# Altium PCB tr-804-DECT_2023-07.PcbDoc (part 1 of 3)
Units mm, origin at the board's own origin, x right, y up, seen from the top; angles counter-clockwise.
Board outline 65 x 137.8 mm, 4 copper layers (Top Layer, Top, Internal Plane 1, PWR, Internal Plane 2, GND, Bottom Layer, Bottom); 160 components, 162 nets, 856 pads, 321 vias.
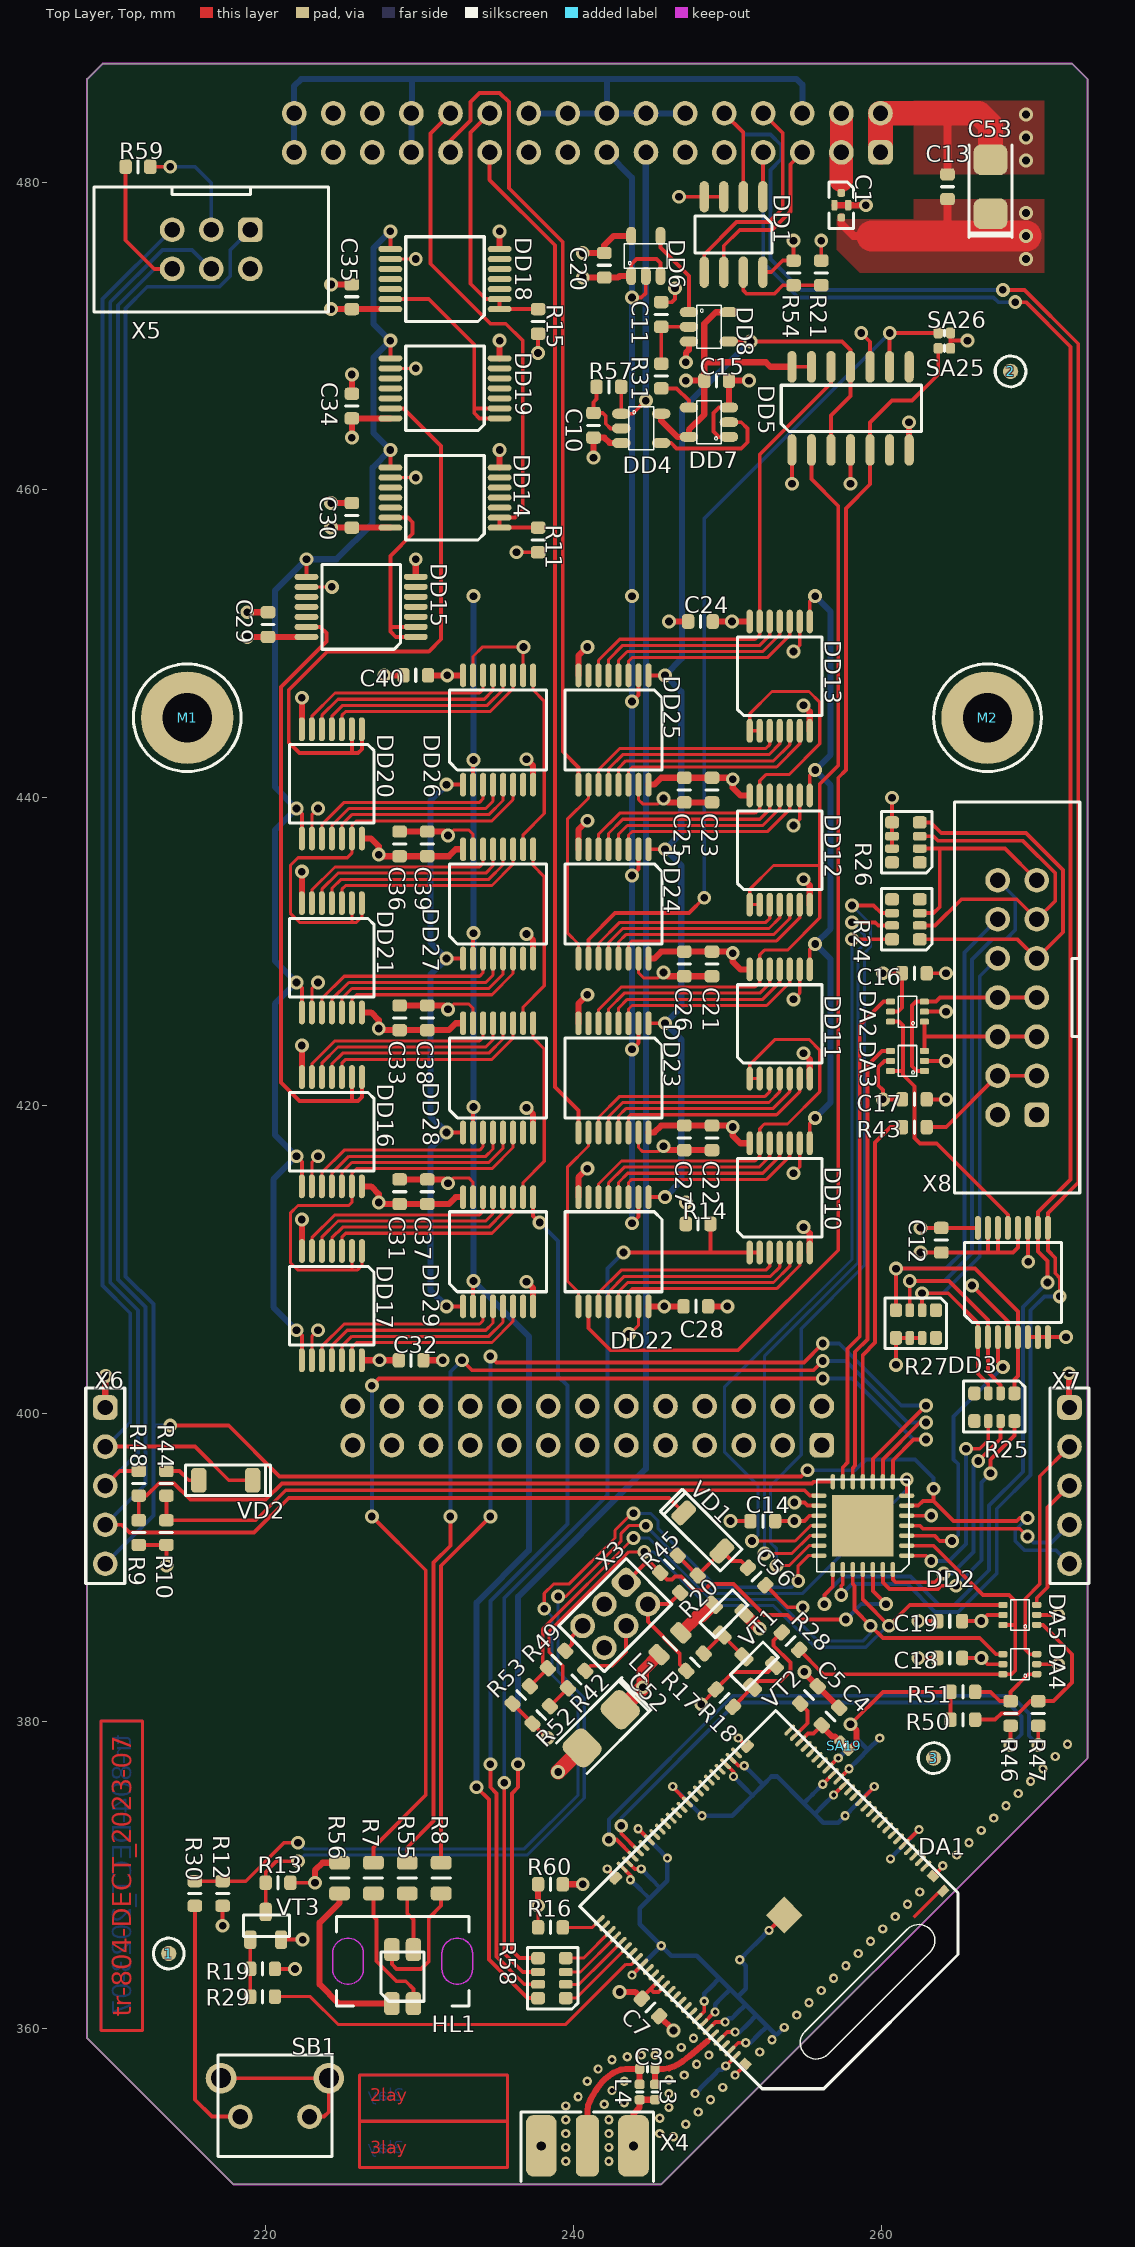
[diagram p0: Top Layer, Top view]
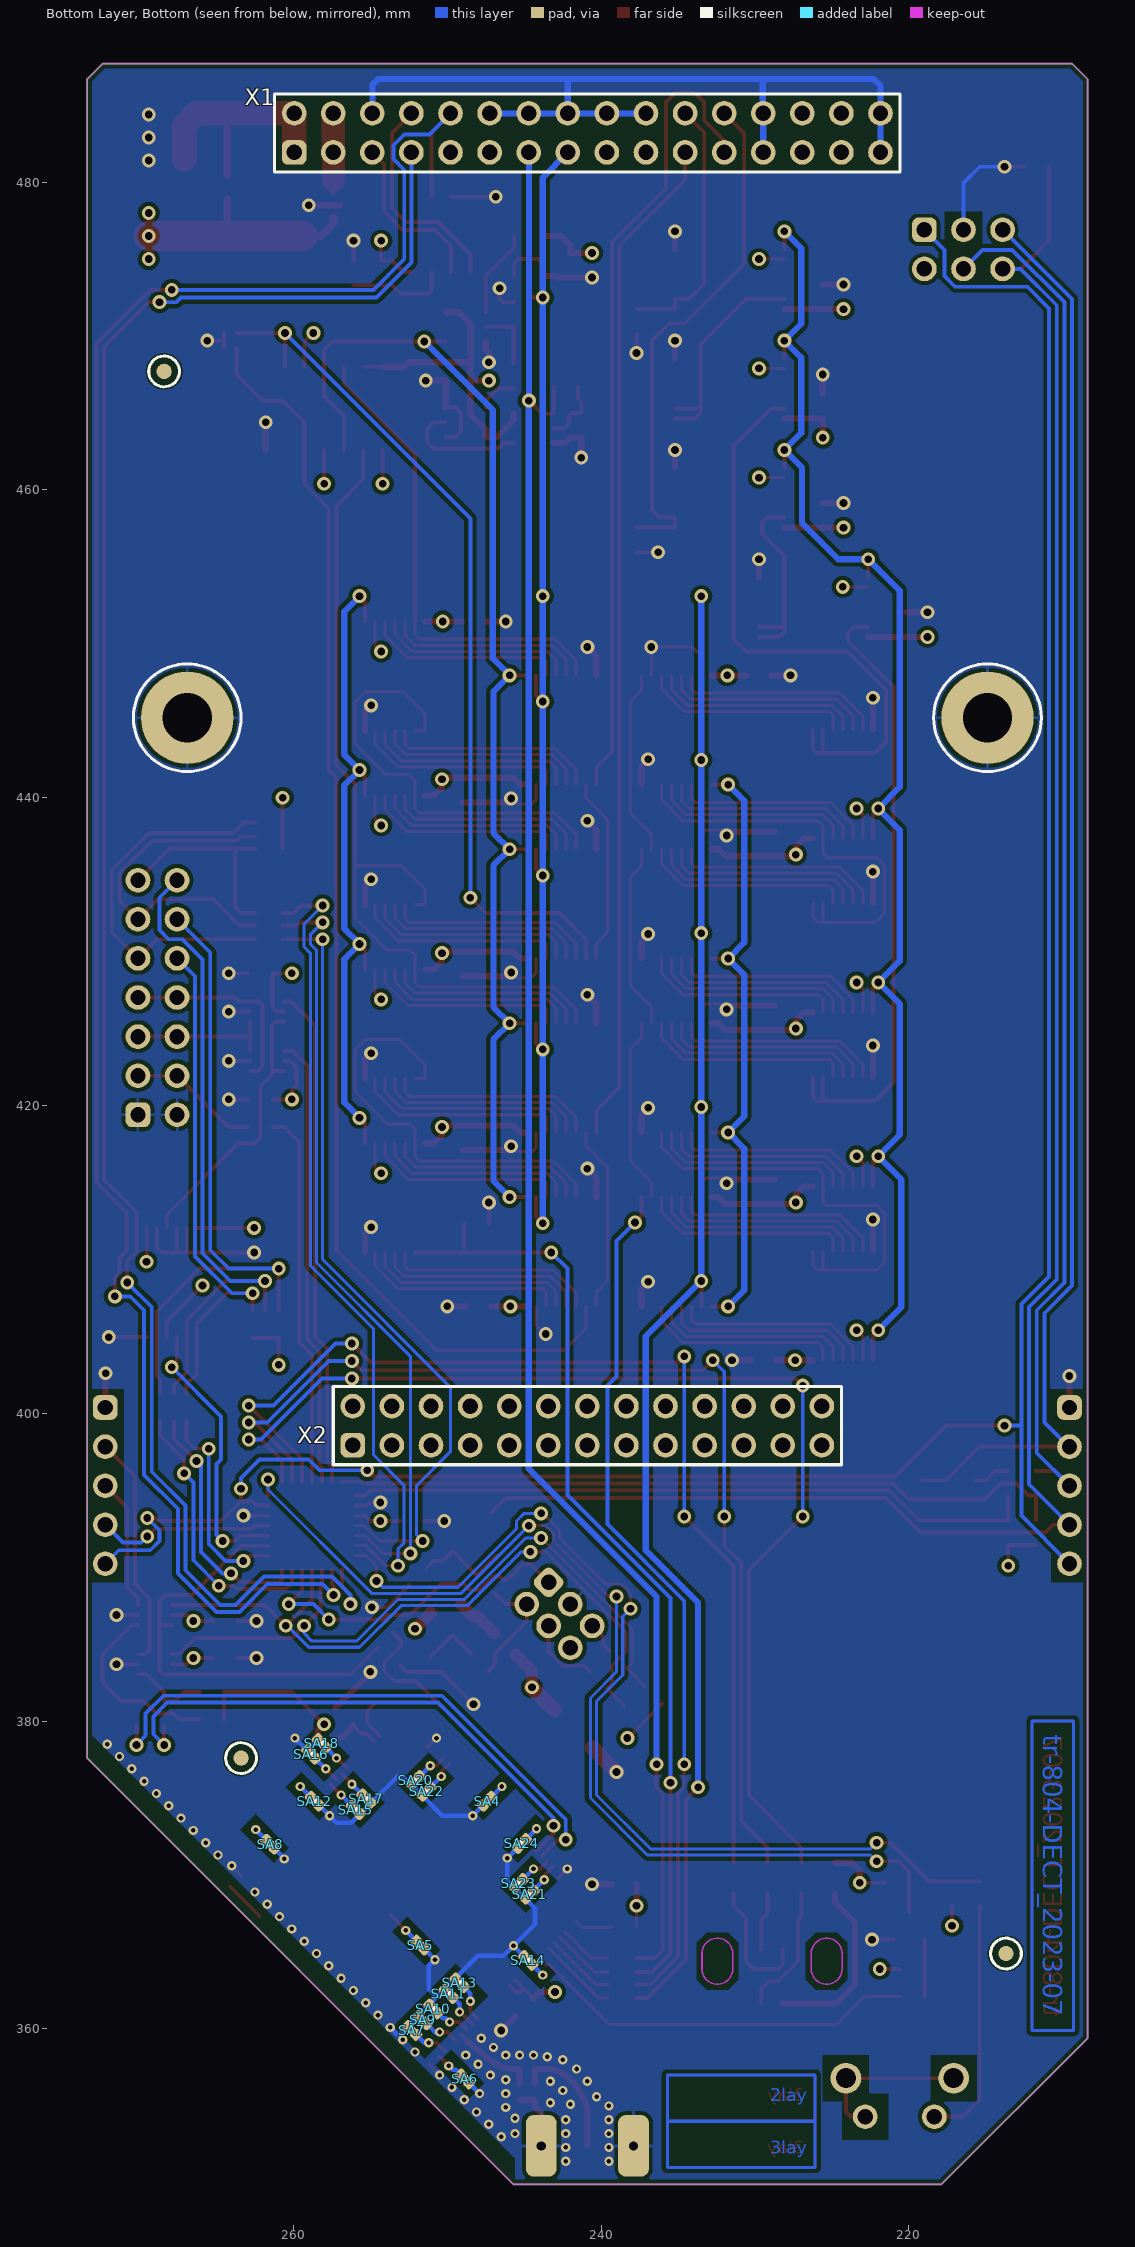
[diagram p1: Bottom Layer, Bottom view, seen from below]
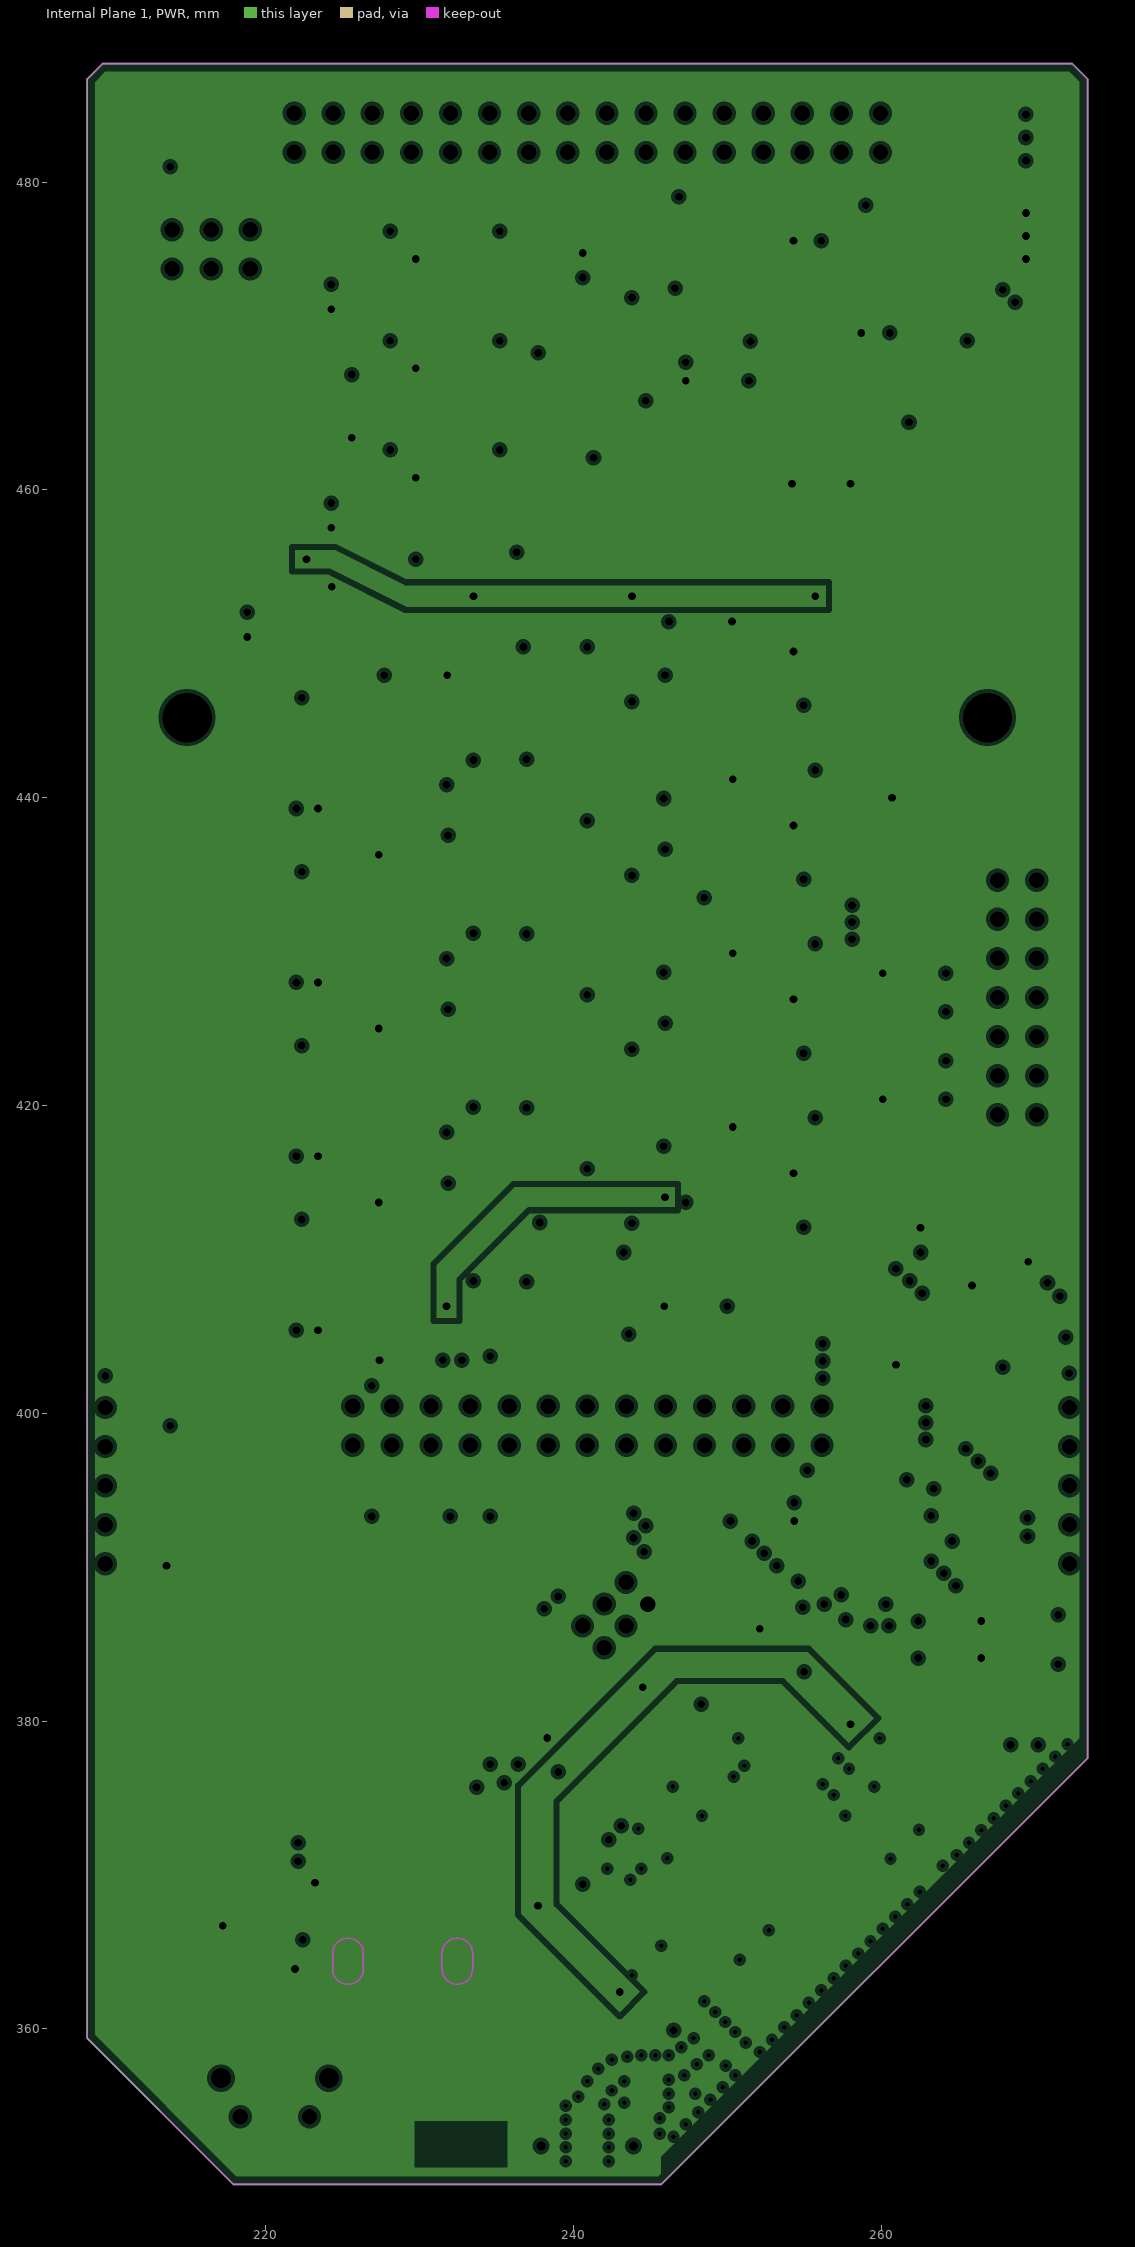
[diagram p2: Internal Plane 1, PWR, clearances drawn from the general rule]
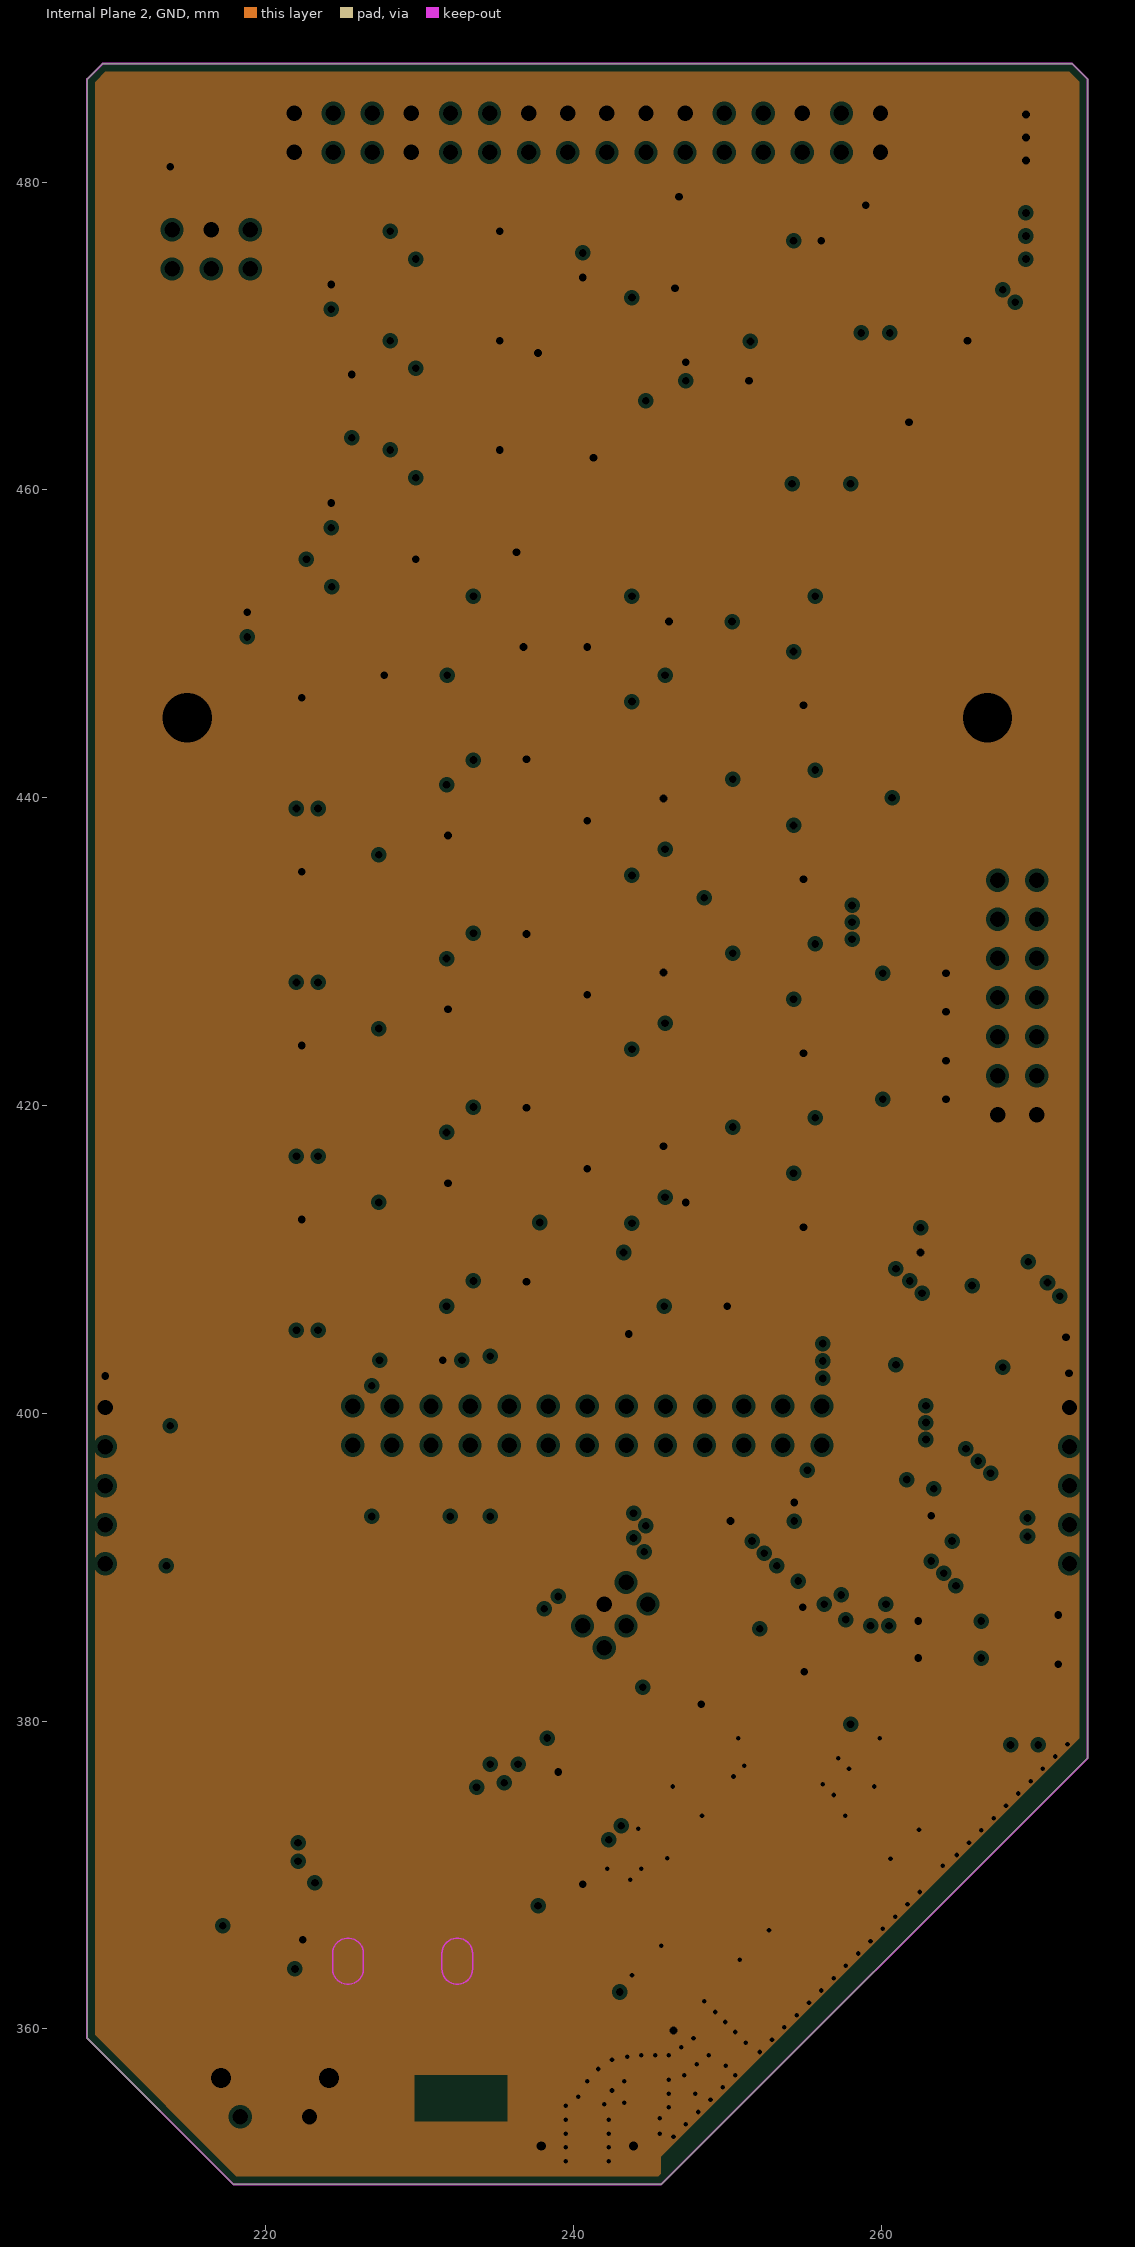
[diagram p3: Internal Plane 2, GND, clearances drawn from the general rule]

## Layer stack, top to bottom
Top Solder, Top Mask: solder mask 0.0102, Solder Resist, Dk 3.5
Top Layer, Top: signal copper 0.0356
Dielectric 1: dielectric 0.32, FR-4, Dk 4.8
Internal Plane 1, PWR: plane copper 0.0356, net +3.3V
Dielectric2: dielectric 0.32, FR-4, Dk 4.8
Internal Plane 2, GND: plane copper 0.0356, net GND
Dielectric3: dielectric 0.32, FR-4, Dk 4.8
Bottom Layer, Bottom: signal copper 0.0356
Bottom Solder, Bot Mask: solder mask 0.0102, Solder Resist, Dk 3.5

## Board outline
208.4,486.7 208.4,359.4 217.9,349.9 245.7,349.9 273.4,377.6 273.4,486.7 272.4,487.7 209.4,487.7

## Design rules (kind name [scope] priority, off if disabled: settings)
Clearance [All] p1: gap=0.254 ignorepadtopadclearanceinfootprint=FALSE except(0: Arc-Hole Track-Hole SMDPad-Hole THPad-Hole Via-Hole Fill-Hole Poly-Hole Region-Hole Text-Hole; 0.2: Arc-Arc Arc-Track Arc-THPad Arc-Via Track-Track Track-THPad Track-Via THPad-THPad THPad-Via Via-Via)
PlaneClearance [All] p1: clearance=0.254
PlaneConnect "PadTherm_M32 [1]" [InPadClass('M32 [1]')] p1: planeconnectstyle=Direct reliefexpansion=0.508 reliefentries=4 reliefconductorwidth=0.254 reliefairgap=0.254
PlaneConnect "PadTherm_Q16-10 [7]" [InPadClass('Q16-10 [7]')] p2: planeconnectstyle=Relief reliefexpansion=0.25 reliefentries=4 reliefconductorwidth=0.3 reliefairgap=0.25
PlaneConnect "PadTherm_Q16-10 [8]" [InPadClass('Q16-10 [8]')] p3: planeconnectstyle=NoConnect reliefexpansion=0.508 reliefentries=4 reliefconductorwidth=0.254 reliefairgap=0.254
PlaneConnect "PadTherm_R16-10 [7]" [InPadClass('R16-10 [7]')] p4: planeconnectstyle=Relief reliefexpansion=0.25 reliefentries=4 reliefconductorwidth=0.3 reliefairgap=0.25
PlaneConnect "PadTherm_R16-10 [8]" [InPadClass('R16-10 [8]')] p5: planeconnectstyle=NoConnect reliefexpansion=0.508 reliefentries=4 reliefconductorwidth=0.254 reliefairgap=0.254
PlaneConnect "PadTherm_R20-13 [1]" [InPadClass('R20-13 [1]')] p6: planeconnectstyle=NoConnect reliefexpansion=0.508 reliefentries=4 reliefconductorwidth=0.254 reliefairgap=0.254
PlaneConnect PadTherm_REP10 [InPadClass('REP10')] p7: planeconnectstyle=NoConnect reliefexpansion=0.508 reliefentries=4 reliefconductorwidth=0.254 reliefairgap=0.254
PlaneConnect PadTherm_SMD06-04 [InPadClass('SMD06-04')] p8: planeconnectstyle=NoConnect reliefexpansion=0.508 reliefentries=4 reliefconductorwidth=0.254 reliefairgap=0.254
PlaneConnect PadTherm_SMD06-07 [InPadClass('SMD06-07')] p9: planeconnectstyle=Relief reliefexpansion=0 reliefentries=4 reliefconductorwidth=0 reliefairgap=0
PlaneConnect PadTherm_SMD08-07 [InPadClass('SMD08-07')] p10: planeconnectstyle=Relief reliefexpansion=0 reliefentries=4 reliefconductorwidth=0 reliefairgap=0
PlaneConnect PadTherm_SMD090-25 [InPadClass('SMD090-25')] p11: planeconnectstyle=NoConnect reliefexpansion=0.508 reliefentries=4 reliefconductorwidth=0.254 reliefairgap=0.254
PlaneConnect PadTherm_SMD10-08 [InPadClass('SMD10-08')] p12: planeconnectstyle=NoConnect reliefexpansion=0.508 reliefentries=4 reliefconductorwidth=0.254 reliefairgap=0.254
PlaneConnect PadTherm_SMD105-030 [InPadClass('SMD105-030')] p13: planeconnectstyle=NoConnect reliefexpansion=0.508 reliefentries=4 reliefconductorwidth=0.254 reliefairgap=0.254
PlaneConnect PadTherm_SMD10x16 [InPadClass('SMD10x16')] p14: planeconnectstyle=NoConnect reliefexpansion=0.508 reliefentries=4 reliefconductorwidth=0.254 reliefairgap=0.254
PlaneConnect PadTherm_SMD120-065 [InPadClass('SMD120-065')] p15: planeconnectstyle=NoConnect reliefexpansion=0.508 reliefentries=4 reliefconductorwidth=0.254 reliefairgap=0.254
PlaneConnect PadTherm_SMD135-90 [InPadClass('SMD135-90')] p16: planeconnectstyle=NoConnect reliefexpansion=0.508 reliefentries=4 reliefconductorwidth=0.254 reliefairgap=0.254
PlaneConnect PadTherm_SMD15-10 [InPadClass('SMD15-10')] p17: planeconnectstyle=NoConnect reliefexpansion=0.508 reliefentries=4 reliefconductorwidth=0.254 reliefairgap=0.254
PlaneConnect PadTherm_SMD155-040 [InPadClass('SMD155-040')] p18: planeconnectstyle=NoConnect reliefexpansion=0.508 reliefentries=4 reliefconductorwidth=0.254 reliefairgap=0.254
PlaneConnect PadTherm_SMD170-170 [InPadClass('SMD170-170')] p19: planeconnectstyle=NoConnect reliefexpansion=0.508 reliefentries=4 reliefconductorwidth=0.254 reliefairgap=0.254
PlaneConnect PadTherm_SMD205-060 [InPadClass('SMD205-060')] p20: planeconnectstyle=NoConnect reliefexpansion=0.508 reliefentries=4 reliefconductorwidth=0.254 reliefairgap=0.254
PlaneConnect "PadTherm_SMD205-060 [1]" [InPadClass('SMD205-060 [1]')] p21: planeconnectstyle=NoConnect reliefexpansion=0.508 reliefentries=4 reliefconductorwidth=0.254 reliefairgap=0.254
PlaneConnect PadTherm_SMD22-20 [InPadClass('SMD22-20')] p22: planeconnectstyle=NoConnect reliefexpansion=0.508 reliefentries=4 reliefconductorwidth=0.254 reliefairgap=0.254
PlaneConnect PadTherm_SMD40-15 [InPadClass('SMD40-15')] p23: planeconnectstyle=NoConnect reliefexpansion=0.508 reliefentries=4 reliefconductorwidth=0.254 reliefairgap=0.254
PlaneConnect PadTherm_SMD40-20 [InPadClass('SMD40-20')] p24: planeconnectstyle=Direct reliefexpansion=0.508 reliefentries=4 reliefconductorwidth=0.254 reliefairgap=0.254
PlaneConnect PadTherm_SMD40-40 [InPadClass('SMD40-40')] p25: planeconnectstyle=NoConnect reliefexpansion=0.508 reliefentries=4 reliefconductorwidth=0.254 reliefairgap=0.254
PlaneConnect PadTherm_SMD55-66 [InPadClass('SMD55-66')] p26: planeconnectstyle=NoConnect reliefexpansion=0.508 reliefentries=4 reliefconductorwidth=0.254 reliefairgap=0.254
PlaneConnect PadTherm_SMD55-80 [InPadClass('SMD55-80')] p27: planeconnectstyle=NoConnect reliefexpansion=0.508 reliefentries=4 reliefconductorwidth=0.254 reliefairgap=0.254
PlaneConnect "PadTherm_SMD60-60 [1]" [InPadClass('SMD60-60 [1]')] p28: planeconnectstyle=NoConnect reliefexpansion=0.508 reliefentries=4 reliefconductorwidth=0.254 reliefairgap=0.254
PlaneConnect PadTherm_SMD60-65 [InPadClass('SMD60-65')] p29: planeconnectstyle=NoConnect reliefexpansion=0.508 reliefentries=4 reliefconductorwidth=0.254 reliefairgap=0.254
PlaneConnect PadTherm_SMD60-70 [InPadClass('SMD60-70')] p30: planeconnectstyle=NoConnect reliefexpansion=0.508 reliefentries=4 reliefconductorwidth=0.254 reliefairgap=0.254
PlaneConnect PadTherm_SMD70-40 [InPadClass('SMD70-40')] p31: planeconnectstyle=NoConnect reliefexpansion=0.508 reliefentries=4 reliefconductorwidth=0.254 reliefairgap=0.254
PlaneConnect PadTherm_SMD70-50 [InPadClass('SMD70-50')] p32: planeconnectstyle=NoConnect reliefexpansion=0.508 reliefentries=4 reliefconductorwidth=0.254 reliefairgap=0.254
PlaneConnect PadTherm_SMD80-95 [InPadClass('SMD80-95')] p33: planeconnectstyle=NoConnect reliefexpansion=0.508 reliefentries=4 reliefconductorwidth=0.254 reliefairgap=0.254
PlaneConnect [All] p34: planeconnectstyle=Relief reliefexpansion=0.508 reliefentries=4 reliefconductorwidth=0.254 reliefairgap=0.254
PolygonConnect PolygonConnect_6 [IsPolygon And InNet('GND') And OnLayer('Bottom Layer, Bottom') vs IsVia] p1: connectstyle=Direct reliefconductorwidth=0.2 reliefentries=4 polygonreliefangle="90 Angle" airgapwidth=0.254
PolygonConnect PolygonConnect_5 [IsPolygon And InNet('GND') And OnLayer('Bottom Layer, Bottom') vs IsPad] p2: connectstyle=Relief reliefconductorwidth=0.2 reliefentries=4 polygonreliefangle="90 Angle" airgapwidth=0.254
PolygonConnect PolygonConnect_4 [IsPolygon And InNet('GND') And OnLayer('Top Layer, Top') vs IsVia] p3: connectstyle=Direct reliefconductorwidth=0.2 reliefentries=4 polygonreliefangle="90 Angle" airgapwidth=0.254
PolygonConnect PolygonConnect_3 [IsPolygon And InNet('GND') And OnLayer('Top Layer, Top') vs IsPad] p4: connectstyle=Direct reliefconductorwidth=0.2 reliefentries=4 polygonreliefangle="90 Angle" airgapwidth=0.254
PolygonConnect PolygonConnect_2 [IsPolygon And InNet('+3.3V') And OnLayer('Top Layer, Top') vs IsVia] p5: connectstyle=Direct reliefconductorwidth=0.2 reliefentries=4 polygonreliefangle="90 Angle" airgapwidth=0.254
PolygonConnect PolygonConnect_1 [IsPolygon And InNet('+3.3V') And OnLayer('Top Layer, Top') vs IsPad] p6: connectstyle=Direct reliefconductorwidth=0.2 reliefentries=4 polygonreliefangle="90 Angle" airgapwidth=0.254
PolygonConnect [All] p7: connectstyle=Relief reliefconductorwidth=0.254 reliefentries=4 polygonreliefangle="90 Angle" airgapwidth=0.254
RoutingVias [All] p1: holewidth=0.711 width=1.27 viastyle="Through Hole" minholewidth=0.711 minwidth=1.27 maxholewidth=0.711 maxwidth=1.27
SolderMaskExpansion [All] p1: expansion=0.102 istentingtop=FALSE
Width [All] p1: maxlimit=0.254 minlimit=0.254 preferedwidth=0.254
28 further rules are at their usual default settings.

## Classes and differential pairs
pad class SMD80-95: C4-1 C4-2 C5-1 C5-2 C7-1 C7-2 C10-1 C10-2 C11-1 C11-2 C12-1 C12-2 C13-1 C13-2 C14-1 C14-2 C15-1 C15-2 C16-1 C16-2 C17-1 C17-2 C18-1 C18-2 C19-1 C19-2 C20-1 C20-2 C21-1 C21-2 C22-1 C22-2 C23-1 C23-2 C24-1 C24-2 C25-1 C25-2 C26-1 C26-2 C27-1 C27-2 C28-1 C28-2 C29-1 C29-2 C30-1 C30-2 C31-1 C31-2 C32-1 C32-2 C33-1 C33-2 C34-1 C34-2 C35-1 C35-2 C36-1 C36-2 C37-1 C37-2 C38-1 C38-2 C39-1 C39-2 C40-1 C40-2 C56-1 C56-2 R9-1 R9-2 R10-1 R10-2 R11-1 R11-2 R12-1 R12-2 R13-1 R13-2 R14-1 R14-2 R15-1 R15-2 R16-1 R16-2 R17-1 R17-2 R18-1 R18-2 R19-1 R19-2 R20-1 R20-2 R21-1 R21-2 R28-1 R28-2 R29-1 R29-2 R30-1 R30-2 R31-1 R31-2 R42-1 R42-2 R43-1 R43-2 R44-1 R44-2 R45-1 R45-2 R46-1 R46-2 R47-1 R47-2 R48-1 R48-2 R49-1 R49-2 R50-1 R50-2 R51-1 R51-2 R52-1 R52-2 R53-1 R53-2 R54-1 R54-2 R57-1 R57-2 R59-1 R59-2 R60-1 R60-2
pad class SMD70-50: DA1-79
pad class SMD70-40: C1-2 C1-4
pad class SMD60-70: SA4-1 SA4-2 SA5-1 SA5-2 SA6-1 SA6-2 SA7-1 SA7-2 SA8-1 SA8-2 SA9-1 SA9-2 SA10-1 SA10-2 SA11-1 SA11-2 SA12-1 SA12-2 SA13-1 SA13-2 SA14-1 SA14-2 SA15-1 SA15-2 SA16-1 SA16-2 SA17-1 SA17-2 SA18-1 SA18-2 SA19-1 SA19-2 SA20-1 SA20-2 SA21-1 SA21-2 SA22-1 SA22-2 SA23-1 SA23-2 SA24-1 SA24-2 SA25-1 SA25-2 SA26-1 SA26-2
pad class SMD60-65: C3-1 C3-2 L3-1 L3-2 L4-1 L4-2
pad class "SMD60-60 [1]": C1-1 C1-3
pad class SMD55-80: DA1-28 DA1-51
pad class SMD55-66: DA1-1 DA1-78
pad class SMD40-40: DD2-29
pad class SMD40-20: X4-2 X4-3
pad class SMD40-15: X4-1
pad class SMD22-20: C52-1 C52-2 C53-1 C53-2
pad class "SMD205-060 [1]": DD5-1 DD5-2 DD5-3 DD5-4 DD5-5 DD5-6 DD5-7 DD5-8 DD5-9 DD5-10 DD5-11 DD5-12 DD5-13 DD5-14
pad class SMD205-060: DD1-1 DD1-2 DD1-3 DD1-4 DD1-5 DD1-6 DD1-7 DD1-8
pad class SMD170-170: DA1-80
pad class SMD155-040: DD3-1 DD3-2 DD3-3 DD3-4 DD3-5 DD3-6 DD3-7 DD3-8 DD3-9 DD3-10 DD3-11 DD3-12 DD3-13 DD3-14 DD3-15 DD3-16 DD10-1 DD10-2 DD10-3 DD10-4 DD10-5 DD10-6 DD10-7 DD10-8 DD10-9 DD10-10 DD10-11 DD10-12 DD10-13 DD10-14 DD11-1 DD11-2 DD11-3 DD11-4 DD11-5 DD11-6 DD11-7 DD11-8 DD11-9 DD11-10 DD11-11 DD11-12 DD11-13 DD11-14 DD12-1 DD12-2 DD12-3 DD12-4 DD12-5 DD12-6 DD12-7 DD12-8 DD12-9 DD12-10 DD12-11 DD12-12 DD12-13 DD12-14 DD13-1 DD13-2 DD13-3 DD13-4 DD13-5 DD13-6 DD13-7 DD13-8 DD13-9 DD13-10 DD13-11 DD13-12 DD13-13 DD13-14 DD14-1 DD14-2 DD14-3 DD14-4 DD14-5 DD14-6 DD14-7 DD14-8 DD14-9 DD14-10 DD14-11 DD14-12 DD14-13 DD14-14 DD15-1 DD15-2 DD15-3 DD15-4 DD15-5 DD15-6 DD15-7 DD15-8 DD15-9 DD15-10 DD15-11 DD15-12 DD15-13 DD15-14 DD16-1 DD16-2 DD16-3 DD16-4 DD16-5 DD16-6 DD16-7 DD16-8 DD16-9 DD16-10 DD16-11 DD16-12 DD16-13 DD16-14 DD17-1 DD17-2 DD17-3 DD17-4 DD17-5 DD17-6 DD17-7 DD17-8 DD17-9 DD17-10 DD17-11 DD17-12 DD17-13 DD17-14 DD18-1 DD18-2 DD18-3 DD18-4 DD18-5 DD18-6 DD18-7 DD18-8 DD18-9 DD18-10 DD18-11 DD18-12 DD18-13 DD18-14 DD19-1 DD19-2 DD19-3 DD19-4 DD19-5 DD19-6 DD19-7 DD19-8 DD19-9 DD19-10 DD19-11 DD19-12 DD19-13 DD19-14 DD20-1 DD20-2 DD20-3 DD20-4 DD20-5 DD20-6 DD20-7 DD20-8 DD20-9 DD20-10 DD20-11 DD20-12 DD20-13 DD20-14 DD21-1 DD21-2 DD21-3 DD21-4 DD21-5 DD21-6 DD21-7 DD21-8 DD21-9 DD21-10 DD21-11 DD21-12 DD21-13 DD21-14 DD22-1 DD22-2 DD22-3 DD22-4 DD22-5 DD22-6 DD22-7 DD22-8 DD22-9 DD22-10 DD22-11 DD22-12 DD22-13 DD22-14 DD22-15 DD22-16 DD23-1 DD23-2 DD23-3 DD23-4 DD23-5 DD23-6 DD23-7 DD23-8 DD23-9 DD23-10 DD23-11 DD23-12 DD23-13 DD23-14 DD23-15 DD23-16 DD24-1 DD24-2 DD24-3 DD24-4 DD24-5 DD24-6 DD24-7 DD24-8 DD24-9 DD24-10 DD24-11 DD24-12 DD24-13 DD24-14 DD24-15 DD24-16 DD25-1 DD25-2 DD25-3 DD25-4 DD25-5 DD25-6 DD25-7 DD25-8 DD25-9 DD25-10 DD25-11 DD25-12 DD25-13 DD25-14 DD25-15 DD25-16 DD26-1 DD26-2 DD26-3 DD26-4 DD26-5 DD26-6 DD26-7 DD26-8 DD26-9 DD26-10 DD26-11 DD26-12 DD26-13 DD26-14 DD26-15 DD26-16 DD27-1 DD27-2 DD27-3 DD27-4 DD27-5 DD27-6 DD27-7 DD27-8 DD27-9 DD27-10 DD27-11 DD27-12 DD27-13 DD27-14 DD27-15 DD27-16 DD28-1 DD28-2 DD28-3 DD28-4 DD28-5 DD28-6 DD28-7 DD28-8 DD28-9 DD28-10 DD28-11 DD28-12 DD28-13 DD28-14 DD28-15 DD28-16 DD29-1 DD29-2 DD29-3 DD29-4 DD29-5 DD29-6 DD29-7 DD29-8 DD29-9 DD29-10 DD29-11 DD29-12 DD29-13 DD29-14 DD29-15 DD29-16
pad class SMD15-10: HL1-An HL1-b HL1-g HL1-r
pad class SMD135-90: L1-1 L1-2 R7-1 R7-2 R8-1 R8-2 R55-1 R55-2 R56-1 R56-2
pad class SMD120-065: DD4-1 DD4-2 DD4-3 DD4-4 DD4-5 DD6-1 DD6-2 DD6-3 DD6-4 DD6-5 DD7-1 DD7-2 DD7-3 DD7-4 DD7-5 DD8-1 DD8-2 DD8-3 DD8-4 DD8-5
pad class SMD10x16: VD1-A VD1-K VD2-A VD2-K
pad class SMD105-030: DD2-1 DD2-2 DD2-3 DD2-4 DD2-5 DD2-6 DD2-7 DD2-8 DD2-9 DD2-10 DD2-11 DD2-12 DD2-13 DD2-14 DD2-15 DD2-16 DD2-17 DD2-18 DD2-19 DD2-20 DD2-21 DD2-22 DD2-23 DD2-24 DD2-25 DD2-26 DD2-27 DD2-28
pad class SMD10-08: VT1-1 VT1-2 VT1-3 VT2-1 VT2-2 VT2-3 VT3-1 VT3-2 VT3-3
pad class SMD090-25: DA1-2 DA1-3 DA1-4 DA1-5 DA1-6 DA1-7 DA1-8 DA1-9 DA1-10 DA1-11 DA1-12 DA1-13 DA1-14 DA1-15 DA1-16 DA1-17 DA1-18 DA1-19 DA1-20 DA1-21 DA1-22 DA1-23 DA1-24 DA1-25 DA1-26 DA1-27 DA1-29 DA1-30 DA1-31 DA1-32 DA1-33 DA1-34 DA1-35 DA1-36 DA1-37 DA1-38 DA1-39 DA1-40 DA1-41 DA1-42 DA1-43 DA1-44 DA1-45 DA1-46 DA1-47 DA1-48 DA1-49 DA1-50 DA1-52 DA1-53 DA1-54 DA1-55 DA1-56 DA1-57 DA1-58 DA1-59 DA1-60 DA1-61 DA1-62 DA1-63 DA1-64 DA1-65 DA1-66 DA1-67 DA1-68 DA1-69 DA1-70 DA1-71 DA1-72 DA1-73 DA1-74 DA1-75 DA1-76 DA1-77
pad class SMD08-07: R24-1 R24-2 R24-7 R24-8 R25-1 R25-2 R25-7 R25-8 R26-1 R26-2 R26-7 R26-8 R27-1 R27-2 R27-7 R27-8 R58-1 R58-2 R58-7 R58-8
pad class SMD06-07: R24-3 R24-4 R24-5 R24-6 R25-3 R25-4 R25-5 R25-6 R26-3 R26-4 R26-5 R26-6 R27-3 R27-4 R27-5 R27-6 R58-3 R58-4 R58-5 R58-6
pad class SMD06-04: DA2-1 DA2-2 DA2-3 DA2-4 DA2-5 DA2-6 DA3-1 DA3-2 DA3-3 DA3-4 DA3-5 DA3-6 DA4-1 DA4-2 DA4-3 DA4-4 DA4-5 DA4-6 DA5-1 DA5-2 DA5-3 DA5-4 DA5-5 DA5-6
pad class REP10: 1-1 2-1 3-1
pad class "R20-13 [1]": SB1-3 SB1-4
pad class "R16-10 [8]": X1-2 X1-3 X1-4 X1-5 X1-6 X1-7 X1-8 X1-9 X1-10 X1-11 X1-12 X1-13 X1-14 X1-15 X1-16 X1-17 X1-18 X1-19 X1-20 X1-21 X1-22 X1-23 X1-24 X1-25 X1-26 X1-27 X1-28 X1-29 X1-30 X1-31 X1-32 X2-2 X2-3 X2-4 X2-5 X2-6 X2-7 X2-8 X2-9 X2-10 X2-11 X2-12 X2-13 X2-14 X2-15 X2-16 X2-17 X2-18 X2-19 X2-20 X2-21 X2-22 X2-23 X2-24 X2-25 X2-26 X6-2 X6-3 X6-4 X6-5 X7-2 X7-3 X7-4 X7-5 X8-2 X8-3 X8-4 X8-5 X8-6 X8-7 X8-8 X8-9 X8-10 X8-11 X8-12 X8-13 X8-14
pad class "R16-10 [7]": SB1-1 SB1-2 X3-2 X3-3 X3-4 X3-5 X3-6 X5-2 X5-3 X5-4 X5-5 X5-6
pad class "Q16-10 [8]": X1-1 X6-1 X7-1 X8-1
pad class "Q16-10 [7]": X2-1 X3-1 X5-1
pad class "M32 [1]": M1-1 M2-1

## Components (designator, comment, footprint, x,y, rotation, side; value= is the part's Value field where it differs from the comment)
1 "{Value}" REP_1 213.7,364.9 r0 top
2 "{Value}" REP_1 268.4,467.7 r0 top
3 "{Value}" REP_1 263.4,377.6 r0 top
C1 "NFM18CC223R1C3D" 0603_MURATA_NFM18PC 257.4,478.5 r270 top
C3 "100p NPO" 0402 244.8,357.4 r180 top
C4 "1u X7R" 0603 256.7,380.3 r45 top
C5 "1u X7R" 0603 255.3,381.7 r45 top
C7 "1u X7R" 0603 245,361.4 r315 top
C10 "1nF NPO" 0603 241.3,464.2 r270 top
C11 "1nF NPO" 0603 245.7,471.4 r90 top
C12 "0.1uF X7R 16V" 0603 263.9,411.25 r270 top
C13 "0.1uF X7R 16V" 0603 264.3,479.7 r90 top
C14 "0.1uF X7R 16V" 0603 252.3,393 r180 top
C15 "0.1uF X7R 16V" 0603 249.3,467.1 r0 top
C16 "0.1uF X7R 16V" 0603 262.15,428.6 r0 top
C17 "0.1uF X7R 16V" 0603 262.15,420.4 r0 top
C18 "0.1uF X7R 16V" 0603 264.45,384.1 r180 top
C19 "0.1uF X7R 16V" 0603 264.45,386.5 r180 top
C20 "0.1uF X7R 16V" 0603 242,474.6 r270 top
C21 "0.1uF X7R 16V" 0603 249,429.2 r270 top
C22 "0.1uF X7R 16V" 0603 249,417.9 r270 top
C23 "0.1uF X7R 16V" 0603 249,440.5 r270 top
C24 "0.1uF X7R 16V" 0603 248.25,451.45 r180 top
C25 "0.1uF X7R 16V" 0603 247.2,440.5 r270 top
C26 "0.1uF X7R 16V" 0603 247.2,429.2 r270 top
C27 "0.1uF X7R 16V" 0603 247.2,417.9 r270 top
C28 "0.1uF X7R 16V" 0603 247.95,406.95 r0 top
C29 "0.1uF X7R 16V" 0603 220.15,451.25 r90 top
C30 "0.1uF X7R 16V" 0603 225.6,458.35 r90 top
C31 "0.1uF X7R 16V" 0603 228.7,414.4 r90 top
C32 "0.1uF X7R 16V" 0603 229.45,403.45 r0 top
C33 "0.1uF X7R 16V" 0603 228.7,425.7 r90 top
C34 "0.1uF X7R 16V" 0603 225.6,465.45 r90 top
C35 "0.1uF X7R 16V" 0603 225.6,472.55 r90 top
C36 "0.1uF X7R 16V" 0603 228.7,437 r90 top
C37 "0.1uF X7R 16V" 0603 230.5,414.4 r90 top
C38 "0.1uF X7R 16V" 0603 230.5,425.7 r90 top
C39 "0.1uF X7R 16V" 0603 230.5,437 r90 top
C40 "0.1uF X7R 16V" 0603 229.75,447.95 r180 top
C52 "100uF 6.3V tantal" CASE_B 241.8,379.5 r225 top
C53 "100uF 6.3V tantal" CASE_B 267.1,479.7 r90 top
C56 "0.1uF X7R 16V" 0603 251.9,389.4 r315 top
DA1 "SC14CVMDECT SF02" SC14CVMDECT(DECT) 253.7,367.4 r225 top
DA2 "74LVC1G3157DW-7" SC70-6 261.7,426.1 r180 top
DA3 "74LVC1G3157DW-7" SC70-6 261.7,422.9 r180 top
DA4 "74LVC1G3157DW-7" SC70-6 269,383.7 r180 top
DA5 "74LVC1G3157DW-7" SC70-6 269,386.9 r180 top
DD1 "AT24C32AN-10SU-2.7" SO-8-1.27_PANTES 250.4,476.6 r270 top
DD2 "PIC18F26K22-I/ML" QFN-28(6X6) 258.8,392.7 r180 top
DD3 "74HC4052PW.112" TSSOP-16-0.65_PANTES 268.55,408.5 r90 top
DD4 "SN74AHC1G86DBVR" SOT-25 244.4,464 r0 top
DD5 "SN74HC74D" SO-14-1.27 258,465.3 r90 top
DD6 "SN74AHC1G14DBVR" SOT-25 244.7,475.2 r90 top
DD7 "SN74AHC1G14DBVR" SOT-25 248.8,464.4 r180 top
DD8 "SN74AHC1G32DBVR" SOT-25 248.8,470.6 r0 top
DD10 "SN74HC164PW" TSSOP-14-0.65_PANTES 253.4,414 r90 top
DD11 "SN74HC164PW" TSSOP-14-0.65_PANTES 253.4,425.3 r90 top
DD12 "SN74HC164PW" TSSOP-14-0.65_PANTES 253.4,436.6 r90 top
DD13 "SN74HC164PW" TSSOP-14-0.65_PANTES 253.4,447.9 r90 top
DD14 "SN74HC164PW" TSSOP-14-0.65_PANTES 231.65,459.5 r180 top
DD15 "SN74HC164PW" TSSOP-14-0.65_PANTES 226.2,452.4 r180 top
DD16 "SN74HC164PW" TSSOP-14-0.65_PANTES 224.3,418.3 r270 top
DD17 "SN74HC164PW" TSSOP-14-0.65_PANTES 224.3,407 r270 top
DD18 "SN74HC164PW" TSSOP-14-0.65_PANTES 231.65,473.7 r180 top
DD19 "SN74HC164PW" TSSOP-14-0.65_PANTES 231.65,466.6 r180 top
DD20 "SN74HC164PW" TSSOP-14-0.65_PANTES 224.3,440.9 r270 top
DD21 "SN74HC164PW" TSSOP-14-0.65_PANTES 224.3,429.6 r270 top
DD22 "SN74HC165PW" TSSOP-16-0.65_PANTES 242.6,410.5 r270 top
DD23 "SN74HC165PW" TSSOP-16-0.65_PANTES 242.6,421.8 r270 top
DD24 "SN74HC165PW" TSSOP-16-0.65_PANTES 242.6,433.1 r270 top
DD25 "SN74HC165PW" TSSOP-16-0.65_PANTES 242.6,444.4 r270 top
DD26 "SN74HC165PW" TSSOP-16-0.65_PANTES 235.1,444.4 r90 top
DD27 "SN74HC165PW" TSSOP-16-0.65_PANTES 235.1,433.1 r90 top
DD28 "SN74HC165PW" TSSOP-16-0.65_PANTES 235.1,421.8 r90 top
DD29 "SN74HC165PW" TSSOP-16-0.65_PANTES 235.1,410.5 r90 top
HL1 "IN-S128TATRGB(Inolux)" 1210LED_LPE1-5-19_LED_1210(LPE1-5-19)(Primary) 228.9,347.4 r90 top
L1 "MMZ2012R102AT" 0805 246.269,385.031 r225 top
L3 "N.M." 0402 245.3,355.9 r270 top
L4 "N.M." 0402 244.3,355.9 r270 top
M1 "M3" M32 214.9,445.2 r0 top
M2 "M3" M32 266.9,445.2 r0 top
R7 "0E 5%" 0805 227,369.8 r90 top
R8 "0E 5%" 0805 231.4,369.8 r270 top
R9 "10k 5%" 0603 211.75,392.25 r270 top
R10 "10k 5%" 0603 213.55,392.25 r270 top
R11 "10k 5%" 0603 237.7,456.75 r90 top
R12 "10k 5%" 0603 217.2,368.8 r270 top
R13 "10k 5%" 0603 220.8,369.5 r0 top
R14 "10k 5%" 0603 248.1,412.3 r0 top
R15 "10k 5%" 0603 237.7,470.95 r90 top
R16 "10k 5%" 0603 238.5,366.6 r180 top
R17 "47k 5%" 0603 247.895,383.829 r45 top
R18 "47k 5%" 0603 249.804,381.496 r135 top
R19 "47k 5%" 0603 219.8,363.9 r0 top
R20 "47k 5%" 0603 247.5,388.9 r45 top
R21 "47k 5%" 0603 256.1,474.1 r90 top
R24 "CAT16-471J4LF" CAY16-J4 261.6,432.1 r180 top
R25 "CAT16-471J4LF" CAY16-J4 267.35,400.4 r270 top
R26 "CAT16-473J4LF" CAY16-J4 261.6,437.1 r180 top
R27 "CAT16-473J4LF" CAY16-J4 262.25,405.8 r270 top
R28 "470E 5%" 0603 254.1,385.2 r135 top
R29 "470E 5%" 0603 219.8,362.1 r180 top
R30 "470E 5%" 0603 215.4,368.8 r90 top
R31 "270E 1%" 0603 245.7,467.4 r90 top
R42 "33E 5%" 0603 240.2,382.7 r225 top
R43 "33E 5%" 0603 262.15,418.6 r0 top
R44 "0E 5%" 0603 213.55,395.45 r270 top
R45 "1k 5%" 0603 246.2,390.2 r45 top
R46 "33E 5%" 0603 268.4,380.5 r90 top
R47 "33E 5%" 0603 270.2,380.5 r90 top
R48 "33E 5%" 0603 211.75,395.45 r270 top
R49 "33E 5%" 0603 238.9,384 r225 top
R50 "N.M.(10k 5%)" 0603 265.3,380.1 r180 top
R51 "N.M.(10k 5%)" 0603 265.3,381.9 r180 top
R52 "N.M.(10k 5%)" 0603 237.9,380.4 r225 top
R53 "N.M.(10k 5%)" 0603 236.6,381.7 r225 top
R54 "N.M.(47k 5%)" 0603 254.3,474.1 r90 top
R55 "1.5k 5%" 0805 229.2,369.8 r270 top
R56 "2.2k 5%" 0805 224.8,369.8 r90 top
R57 "330E 1%" 0603 242.3,466.7 r0 top
R58 "CAT16-330J4LF" CAY16-J4 238.6,363.3 r180 top
R59 "1k 5%" 0603 211.7,481 r0 top
R60 "4k7 5%" 0603 238.5,369.4 r0 top
SA4 "enable" JUMPER_0603 247.4,374.8 r135 bottom
SA5 "enable" JUMPER_0603 251.75,365.45 r45 bottom
SA6 "enable" JUMPER_0603 248.85,356.75 r45 bottom
SA7 "enable" JUMPER_0603 252.3,359.9 r225 bottom
SA8 "enable" JUMPER_0603 261.5,372 r45 bottom
SA9 "enable" JUMPER_0603 251.6,360.6 r225 bottom
SA10 "enable" JUMPER_0603 250.9,361.3 r225 bottom
SA11 "enable" JUMPER_0603 249.9,362.3 r225 bottom
SA12 "enable" JUMPER_0603 258.6,374.8 r45 bottom
SA13 "enable" JUMPER_0603 249.2,363 r225 bottom
SA14 "enable" JUMPER_0603 244.75,364.45 r225 bottom
SA15 "enable" JUMPER_0603 255.95,374.25 r45 bottom
SA16 "enable" JUMPER_0603 258.85,377.85 r225 bottom
SA17 "enable" JUMPER_0603 255.25,374.95 r45 bottom
SA18 "enable" JUMPER_0603 258.15,378.55 r225 bottom
SA19 "enable" JUMPER_0603 257.6,378.4 r315 top
SA20 "enable" JUMPER_0603 252.05,376.15 r135 bottom
SA21 "enable" JUMPER_0603 244.65,368.75 r135 bottom
SA22 "enable" JUMPER_0603 251.35,375.45 r135 bottom
SA23 "enable" JUMPER_0603 245.35,369.45 r135 bottom
SA24 "enable" JUMPER_0603 245.15,372.05 r135 bottom
SA25 "disable" JUMPER_0603 264.1,469.2 r0 top
SA26 "disable" JUMPER_0603 264.1,470.2 r0 top
SB1 "KLS7-TS6606-8.0-180 (h=8mm)" BUTTON_TC-0206 220.6,347.3 r180 top
VD1 "LL4148-GS08" SOD80C_DIOD_SOD80C(DIOMELF3515X160N(SOD80C)) 248.4,392.3 r135 top
VD2 "LL4148-GS08" SOD80C_DIOD_SOD80C(DIOMELF3515X160N(SOD80C)) 217.4,395.65 r0 top
VT1 "IRLML9301TRPBF" SOT-23 249.733,386.941 r45 top
VT2 "FDV301N" SOT-23 251.713,383.546 r45 top
VT3 "FDV301N" SOT-23 220,366.7 r0 top
X1 "PLD-32" PBD-32 259.95,481.93 r90 bottom
X2 "PLD-26" PBD-26 256.14,397.93 r90 bottom
X3 "PLD2-6" PBD2-6 243.419,389.016 r315 top
X4 "HYR-1142(HOYUTEC)" SMA_HYR-1142 240.9,349.9 r180 top
X5 "IDC-6MS" IDC-6 219,476.9 r270 top
X6 "PLS-5" PLS-5 209.57,400.38 r0 top
X7 "PLS-5" PLS-5 272.229,400.38 r0 top
X8 "IDC-14MS" IDC-14 270.1,419.4 r180 top

## Footprints (in the part's own frame and the unit in brackets; to place one, negate y for a bottom-side part, rotate by r counter-clockwise, add the part's x,y. Pads: shape width x height; smd on the part's side, far side on the other; paste and mask are expansions set on the pad)
0402 [mm]
  rrect50% 0.6x0.65 smd mask-25.4: 1(-0.5,0) 2(0.5,0)
  silkscreen extent 0,-0.2 0,0.2
0603 [mm]
  rrect50% 0.8x0.95 smd mask-25.4: 1(-0.8,0) 2(0.8,0)
  silkscreen extent 0,-0.4 0,0.4
0603_MURATA_NFM18PC [mm]
  rrect50% 0.5x0.5 smd mask-25.4: 1(-0.8,0) 3(0.8,0)
  rrect50% 0.7x0.4 smd mask-25.4: 2(0,0.45) 4(0,-0.45)
  silkscreen extent -1.5,-0.8 1.5,0.8
0805 [mm]
  rrect50% 0.9x1.35 smd mask-25.4: 1(-1,0) 2(1,0)
  silkscreen extent 0,-0.6 0,0.6
1210LED_LPE1-5-19_LED_1210(LPE1-5-19)(Primary) [mm]
  rrect50% 1.5x1 smd mask-25.4: An(14.25,0.7) b(17.75,0.7) g(17.75,-0.7) r(14.25,-0.7)
  Top Layer, Top pour cut-out: 15.15,3.55 15.15,2.85 15.8,2.2 18.2,2.2 18.85,2.85 18.85,4.25 18.2,4.9 15.8,4.9 15.15,4.25
  Top Layer, Top pour cut-out: 15.15,-3.55 15.15,-4.25 15.8,-4.9 18.2,-4.9 18.85,-4.25 18.85,-2.85 18.2,-2.2 15.8,-2.2 15.15,-2.85
  Bottom Layer, Bottom pour cut-out: 15.15,2.85 15.8,2.2 18.2,2.2 18.85,2.85 18.85,4.25 18.2,4.9 15.8,4.9 15.15,4.25
  Bottom Layer, Bottom pour cut-out: 15.15,-4.25 15.8,-4.9 18.2,-4.9 18.85,-4.25 18.85,-2.85 18.2,-2.2 15.8,-2.2 15.15,-2.85
  Keep-Out Layer, Board lines w0.1: 16.5,4.55 ccw(c16.5,3.55) 16.5,2.55 17.5,2.55 ccw(c17.5,3.55) 17.5,4.55 16.5,4.55 ; 16.5,-2.55 ccw(c16.5,-3.55) 16.5,-4.55 17.5,-4.55 ccw(c17.5,-3.55) 17.5,-2.55 16.5,-2.55
  silkscreen extent 14.1,-4.3 19.9,4.3
BUTTON_TC-0206 [mm]
  round 1.6 hole 1: 1(-2.25,-7) 2(2.25,-7)
  round 2 hole 1.3 mask-25.4: 3(-3.5,-9.5) 4(3.5,-9.5)
  silkscreen extent -3.7,-11 3.7,-4.4
CASE_B [mm]
  rrect50% 2x2.2 smd mask-25.4: 1(-1.75,0) 2(1.75,0)
  silkscreen extent -3.3,-1.4 2.7,1.4
CAY16-J4 [mm]
  rrect50% 0.9x0.8 smd mask-25.4: 1(-0.9,1.3) 2(0.9,1.3) 7(-0.9,-1.3) 8(0.9,-1.3)
  rrect50% 0.9x0.55 smd mask-25.4: 3(-0.9,0.4) 4(0.9,0.4) 5(-0.9,-0.4) 6(0.9,-0.4)
  silkscreen extent -1.7,-2 1.6,2
IDC-6 [mm]
  rrect50% 1.6x1.6 hole 1: 1(0,0)
  round 1.6 hole 1: 2(2.54,0) 3(0,-2.54) 4(2.54,-2.54) 5(0,-5.08) 6(2.54,-5.08)
  silkscreen extent -2.79,-10.16 5.33,5.08
IDC-14 [mm]
  rrect50% 1.6x1.6 hole 1 mask-25.4: 1(0,0)
  round 1.6 hole 1 mask-25.4: 2(2.54,0) 3(0,-2.54) 4(2.54,-2.54) 5(0,-5.08) 6(2.54,-5.08) 7(0,-7.62) 8(2.54,-7.62) 9(0,-10.16) 10(2.54,-10.16) 11(0,-12.7) 12(2.54,-12.7) 13(0,-15.24) 14(2.54,-15.24)
  silkscreen extent -2.79,-20.32 5.33,5.08
JUMPER_0603 [mm]
  rrect50% 0.6x0.7 smd mask-25.4: 1(-0.4,0) 2(0.4,0)
  silkscreen extent 0,-0.2 0,0.2
M32 [mm]
  round 6 hole 3.2: 1(0,0)
  silkscreen extent -3.5,-3.5 3.5,3.5
PBD2-6 [mm]
  rrect50% 1.6x1.6 hole 1: 1(0,0)
  round 1.6 hole 1: 2(2,0) 3(0,-2) 4(2,-2) 5(0,-4) 6(2,-4)
  silkscreen extent -1.1,-5.1 3.1,1.1
PBD-26 [mm]
  rrect50% 1.6x1.6 hole 1: 1(0,0)
  round 1.6 hole 1 mask-25.4: 2(2.54,0) 3(0,-2.54) 4(2.54,-2.54) 5(0,-5.08) 6(2.54,-5.08) 7(0,-7.62) 8(2.54,-7.62) 9(0,-10.16) 10(2.54,-10.16) 11(0,-12.7) 12(2.54,-12.7) 13(0,-15.24) 14(2.54,-15.24) 15(0,-17.78) 16(2.54,-17.78) 17(0,-20.32) 18(2.54,-20.32) 19(0,-22.86) 20(2.54,-22.86) 21(0,-25.4) 22(2.54,-25.4) 23(0,-27.94) 24(2.54,-27.94) 25(0,-30.48) 26(2.54,-30.48)
  silkscreen extent -1.27,-31.75 3.81,1.27
PBD-32 [mm]
  rrect50% 1.6x1.6 hole 1 mask-25.4: 1(0,0)
  round 1.6 hole 1 mask-25.4: 2(2.54,0) 3(0,-2.54) 4(2.54,-2.54) 5(0,-5.08) 6(2.54,-5.08) 7(0,-7.62) 8(2.54,-7.62) 9(0,-10.16) 10(2.54,-10.16) 11(0,-12.7) 12(2.54,-12.7) 13(0,-15.24) 14(2.54,-15.24) 15(0,-17.78) 16(2.54,-17.78) 17(0,-20.32) 18(2.54,-20.32) 19(0,-22.86) 20(2.54,-22.86) 21(0,-25.4) 22(2.54,-25.4) 23(0,-27.94) 24(2.54,-27.94) 25(0,-30.48) 26(2.54,-30.48) 27(0,-33.02) 28(2.54,-33.02) 29(0,-35.56) 30(2.54,-35.56) 31(0,-38.1) 32(2.54,-38.1)
  silkscreen extent -1.27,-39.37 3.81,1.27
PLS-5 [mm]
  rrect50% 1.6x1.6 hole 1 mask-25.4: 1(0,0)
  round 1.6 hole 1 mask-25.4: 2(0,-2.54) 3(0,-5.08) 4(0,-7.62) 5(0,-10.16)
  silkscreen extent -1.27,-11.43 1.27,1.27
QFN-28(6X6) [mm]
  oval 1x0.3 smd mask-25.4: 1(-2.85,1.95) 2(-2.85,1.3) 3(-2.85,0.65) 4(-2.85,0) 5(-2.85,-0.65) 6(-2.85,-1.3) 7(-2.85,-1.95) 15(2.85,-1.95) 16(2.85,-1.3) 17(2.85,-0.65) 18(2.85,0) 19(2.85,0.65) 20(2.85,1.3) 21(2.85,1.95)
  oval 0.3x1 smd mask-25.4: 8(-1.95,-2.85) 9(-1.3,-2.85) 10(-0.65,-2.85) 11(0,-2.85) 12(0.65,-2.85) 13(1.3,-2.85) 14(1.95,-2.85) 22(1.95,2.85) 23(1.3,2.85) 24(0.65,2.85) 25(0,2.85) 26(-0.65,2.85) 27(-1.3,2.85) 28(-1.95,2.85)
  rect 4x4 smd mask-25.4: 29(0,0)
  silkscreen extent -3,-3 3,3
REP_1 [mm]
  round 1 all layers, no hole: 1(0,0)
  Top Layer, Top pour cut-out: -1.1,-0.5 -0.9,-0.8 -0.5,-1.1 0,-1.2 0.5,-1.1 0.9,-0.8 1.1,-0.5 1.2,0 1.1,0.5 0.8,0.9 0.5,1.1 0,1.2 -0.5,1.1 -0.8,0.9 -1.1,0.5 -1.2,0
  Bottom Layer, Bottom pour cut-out: -1.1,-0.5 -0.9,-0.8 -0.5,-1.1 0,-1.2 0.5,-1.1 0.9,-0.8 1.1,-0.5 1.2,0 1.1,0.5 0.8,0.9 0.5,1.1 0,1.2 -0.5,1.1 -0.8,0.9 -1.1,0.5 -1.2,0
  silkscreen extent -1,-1 1,1
SC14CVMDECT(DECT) [mm]
  rect 0.55x0.66 smd mask-25.4: 1(-8.62,5.05) 78(8.62,5.05)
  oval 0.9x0.25 smd mask-25.4: 2(-8.75,4.25) 3(-8.75,3.75) 4(-8.75,3.25) 5(-8.75,2.75) 6(-8.75,2.25) 7(-8.75,1.75) 8(-8.75,1.25) 9(-8.75,0.75) 10(-8.75,0.25) 11(-8.75,-0.25) 12(-8.75,-0.75) 13(-8.75,-1.25) 14(-8.75,-1.75) 15(-8.75,-2.25) 16(-8.75,-2.75) 17(-8.75,-3.25) 18(-8.75,-3.75) 19(-8.75,-4.25) 20(-8.75,-4.75) 21(-8.75,-5.25) 22(-8.75,-5.75) 23(-8.75,-6.25) 24(-8.75,-6.75) 25(-8.75,-7.25) 26(-8.75,-7.75) 27(-8.75,-8.25) 52(8.75,-8.25) 53(8.75,-7.75) 54(8.75,-7.25) 55(8.75,-6.75) 56(8.75,-6.25) 57(8.75,-5.75) 58(8.75,-5.25) 59(8.75,-4.75) 60(8.75,-4.25) 61(8.75,-3.75) 62(8.75,-3.25) 63(8.75,-2.75) 64(8.75,-2.25) 65(8.75,-1.75) 66(8.75,-1.25) 67(8.75,-0.75) 68(8.75,-0.25) 69(8.75,0.25) 70(8.75,0.75) 71(8.75,1.25) 72(8.75,1.75) 73(8.75,2.25) 74(8.75,2.75) 75(8.75,3.25) 76(8.75,3.75) 77(8.75,4.25)
  rrect50% 0.8x0.55 smd mask-25.4: 28(-6.05,-9.43) 51(6.05,-9.43)
  oval 0.25x0.9 smd mask-25.4: 29(-5.25,-9.65) 30(-4.75,-9.65) 31(-4.25,-9.65) 32(-3.75,-9.65) 33(-3.25,-9.65) 34(-2.75,-9.65) 35(-2.25,-9.65) 36(-1.75,-9.65) 37(-1.25,-9.65) 38(-0.75,-9.65) 39(-0.25,-9.65) 40(0.25,-9.65) 41(0.75,-9.65) 42(1.25,-9.65) 43(1.75,-9.65) 44(2.25,-9.65) 45(2.75,-9.65) 46(3.25,-9.65) 47(3.75,-9.65) 48(4.25,-9.65) 49(4.75,-9.65) 50(5.25,-9.65)
  rect 0.7x0.5 smd mask-25.4: 79(-8.4,6.2)
  rect 1.7x1.7 smd mask-25.4: 80(0,0)
  Top Layer, Top region: -8.75,6.15 -8.75,5.95 -5.85,5.95 -5.85,6.15
  silkscreen extent -9,-9.8 9,9.79
SC70-6 [mm]
  rrect50% 0.6x0.4 smd mask-25.4: 1(-1.1,0.65) 2(-1.1,0) 3(-1.1,-0.65) 4(1.1,-0.65) 5(1.1,0) 6(1.1,0.65)
  silkscreen extent -0.6,-1 0.6,1
SMA_HYR-1142 [mm]
  rrect50% 1.5x4 smd mask-25.4: 1(0,-2.5)
  rrect50% 2x4 hole 0.6 mask-25.4: 2(-3,-2.5) 3(3,-2.5)
  silkscreen extent -4.3,-4.7 4.3,-0.2
SO-8-1.27_PANTES [mm]
  oval 2.05x0.6 smd mask-25.4: 1(-2.45,1.905) 2(-2.45,0.635) 3(-2.45,-0.635) 4(-2.45,-1.905) 5(2.45,-1.905) 6(2.45,-0.635) 7(2.45,0.635) 8(2.45,1.905)
  silkscreen extent -1.2,-2.5 1.2,2.5
SO-14-1.27 [mm]
  oval 2.05x0.6 smd mask-25.4: 1(-2.7,3.809) 2(-2.7,2.539) 3(-2.7,1.269) 4(-2.7,-0.001) 5(-2.7,-1.271) 6(-2.7,-2.541) 7(-2.7,-3.811) 8(2.7,-3.811) 9(2.7,-2.541) 10(2.7,-1.271) 11(2.7,-0.001) 12(2.7,1.269) 13(2.7,2.539) 14(2.7,3.809)
  silkscreen extent -1.5,-4.6 1.5,4.5
SOD80C_DIOD_SOD80C(DIOMELF3515X160N(SOD80C)) [mm]
  rrect50% 1x1.6 smd mask-25.4: A(-1.75,0) K(1.75,0)
  silkscreen extent -2.6,-1 2.9,1
SOT-23 [mm]
  rrect50% 0.8x1.2 smd mask-25.4: 1(-1,-0.9) 2(0,0.9) 3(1,-0.9)
  silkscreen extent -1.45,-0.7 1.55,0.7
SOT-25 [mm]
  oval 1.2x0.65 smd mask-25.4: 1(-1.3,0.95) 2(-1.3,0) 3(-1.3,-0.95) 4(1.3,-0.95) 5(1.3,0.95)
  silkscreen extent -0.8,-1.4 0.8,1.4
TSSOP-14-0.65_PANTES [mm]
  oval 1.55x0.4 smd mask-25.4: 1(-3.55,1.949) 2(-3.55,1.299) 3(-3.55,0.649) 4(-3.55,-0.001) 5(-3.55,-0.651) 6(-3.55,-1.301) 7(-3.55,-1.951) 8(3.55,-1.951) 9(3.55,-1.301) 10(3.55,-0.651) 11(3.55,-0.001) 12(3.55,0.649) 13(3.55,1.299) 14(3.55,1.949)
  silkscreen extent -2.55,-2.75 2.55,2.75
TSSOP-16-0.65_PANTES [mm]
  oval 1.55x0.4 smd mask-25.4: 1(-3.55,2.275) 2(-3.55,1.625) 3(-3.55,0.975) 4(-3.55,0.325) 5(-3.55,-0.325) 6(-3.55,-0.975) 7(-3.55,-1.625) 8(-3.55,-2.275) 9(3.55,-2.275) 10(3.55,-1.625) 11(3.55,-0.975) 12(3.55,-0.325) 13(3.55,0.325) 14(3.55,0.975) 15(3.55,1.625) 16(3.55,2.275)
  silkscreen extent -2.6,-3.15 2.6,3.15

## Part data
1 2 3 C1 C3 C4 C5 C7 C10 C11 C12 C13 C14 C15 C16 C17 C18 C19 C20 C21 C22 C23 C24 C25 C26 C27 C28 C29 C30 C31 C32 C33 C34 C35 C36 C37 C38 C39 C40 C52 C56 DA2 DA3 DA4 DA5 DD1 DD2 DD3 DD4 DD5 DD6 DD7 DD8 DD10 DD11 DD12 DD13 DD14 DD15 DD16 DD17 DD18 DD19 DD20 DD21 DD22 DD23 DD24 DD25 DD26 DD27 DD28 DD29 HL1 L1 M1 M2 R7 R8 R9 R10 R11 R12 R13 R14 R15 R16 R17 R18 R19 R20 R21 R24 R25 R26 R27 R28 R29 R30 R31 R42 R43 R44 R45 R46 R47 R48 R49 R55 R56 R57 R58 R59 R60 SA4 SA5 SA6 SA7 SA8 SA9 SA10 SA11 SA12 SA13 SA14 SA15 SA16 SA17 SA18 SA19 SA20 SA21 SA22 SA23 SA24 SA25 SA26 SB1 VD1 VD2 VT1 VT2 VT3 X1 X2 X3 X5 X6 X7 X8: "{Description}"
C53 L3 L4 R50 R51 R52 R53 R54: "не закупать и не монтировать"
DA1: "уточнить перед заказом"
X4: "закупить но не монтировать"

## Via types
v1: diameter 0.9, hole 0.5, Top Layer, Top to Bottom Layer, Bottom, 229 vias
v2: diameter 0.6, hole 0.3, Top Layer, Top to Bottom Layer, Bottom, 92 vias

## Nets (pads, with @x,y where several pads share a name; then routed paths per layer and width w, separated by ;. In a path a pad name is that pad's centre, name@x,y a point inside that pad or via, vN(x,y) a via of type N, cw(c..) or ccw(c..) an arc to the next point about the centre after c; other vN are vias at no path point)
+3.3V: C1.3 C12.1 C13.1 C14.1 C15.1 C16.1 C17.1 C18.1 C19.1 C20.1 C21.1 C22.1 C23.1 C24.1 C25.1 C26.1 C27.1 C28.1 C29.1 C30.1 C31.1 C32.1 C33.1 C34.1 C35.1 C36.1 C37.1 C38.1 C39.1 C40.1 C53.1 DA2.5 DA3.5 DA4.5 DA5.5 DD1.8 DD2.17 DD3.4 DD3.11 DD3.16 DD4.5 DD5.1 DD5.4 DD5.10 DD5.13 DD5.14 DD6.5 DD7.5 DD8.5 DD10.9 DD10.14 DD11.9 DD11.14 DD12.9 DD12.14 DD13.9 DD13.14 DD14.9 DD14.14 DD15.9 DD15.14 DD16.9 DD16.14 DD17.9 DD17.14 DD18.9 DD18.14 DD19.9 DD19.14 DD20.9 DD20.14 DD21.9 DD21.14 DD22.16 DD23.16 DD24.16 DD25.16 DD26.16 DD27.16 DD28.16 DD29.16 R9.2 R10.2 R12.2 R13.2 R17.1 R19.2 R20.1 R26.4 R26.6 R26.8 R27.4 R27.6 R27.8 R52.2 R53.2 R54.2 R56.2 VT1.3 X3.2 | length 201.2
  Top Layer, Top w0.2: DD15.9@222.65,453.701 v1(224.3,453.7) v1(224.3,453.7) ; DD17.9@222.999,403.45 222.999,404.999 v1(223.4,405.4) ; DD16.9@222.999,414.75 222.999,416.299 v1(223.4,416.7) ; DD21.9@222.999,426.05 222.999,427.599 v1(223.4,428) ; DD20.9@222.999,437.35 222.999,438.899 v1(223.4,439.3) ; DD14.9@228.1,460.801 229.649,460.801 v1(229.75,460.8) ; DD19.9@228.1,467.901 229.649,467.901 v1(229.75,467.9) ; DD18.9@228.1,475.001 229.649,475.001 v1(229.75,475) ; v1(254.3,415.6) 254.701,416.001 DD10.9@254.701,417.55 ; v1(254.3,426.9) 254.701,427.301 DD11.9@254.701,428.85 ; v1(254.3,438.2) 254.701,438.601 DD12.9@254.701,440.15 ; v1(254.3,449.5) 254.701,449.901 DD13.9@254.701,451.45
  Top Layer, Top w0.25: R9.2@211.75,391.45 R10.2@213.55,391.45 v1(213.55,390.1) ; v1(217.2,366.7) R12.2@217.2,368 ; R19.2@220.6,363.9 v1(221.9,363.9) ; R13.2@221.6,369.5 v1(223.2,369.5) ; R53.2@236.034,381.134 R52.2@237.334,379.834 238.269,378.9 v1(238.3,378.9) ; R20.1@246.934,388.334 246.202,387.602 X3.2@244.833,387.602 244.833,386.467 246.9,384.4 246.9,383.693 R17.1@247.329,383.264 ; DD1.8@252.305,474.15 252.85,474.15 253.6,474.9 R54.2@254.3,474.9 v1(254.3,476.2) ; C14.1@253.1,393 v1(254.35,393) 255,393 255.35,393.35 DD2.17@255.95,393.35 ; DD5.1@254.191,462.6 254.191,460.409 v1(254.2,460.4) ; DD5.14@254.191,468 DD5.13@255.461,468 ; DD5.4@258.001,462.6 v1(258,460.4) ; v1(258.7,470.2) 259.271,469.629 DD5.10@259.271,468 ; v1(260.1,428.6) C16.1@261.35,428.6 261.35,426.35 261.1,426.1 DA2.5@260.6,426.1 ; DA3.5@260.6,422.9 260.2,422.9 259.8,422.5 259.8,421.3 260.1,421 v1(260.1,420.4) C17.1@261.35,420.4 ; R26.4@260.7,436.7 R26.6@260.7,437.5 R26.8@260.7,438.4 v1(260.7,440) ; v1(260.95,403.15) R27.8@260.95,404.9 R27.6@261.85,404.9 R27.4@262.65,404.9 ; v1(262.55,412.05) C12.1@263.9,412.05 DD3.16@266.275,412.05 ; C18.1@265.25,384.1 v1(266.5,384.1) 266.9,383.7 DA4.5@267.9,383.7 ; C19.1@265.25,386.5 v1(266.5,386.5) ; v1(265.9,408.3) 268.225,405.975 DD3.4@268.225,404.95 ; v1@266.7,386.5 v1(266.5,386.5) ; DA5.5@267.9,386.9 266.9,386.9 v1(266.5,386.5) ; DD3.11@269.525,412.05 269.525,409.875 v1(269.55,409.85) ; v1(258,460.4) v1(258,460.4) ; VT1.3@250.9,387.188 VT1.3@251.077,387.011 250.9,387.2 VT1.3@250.9,387.188
  Top Layer, Top w0.4: v1(218.8,450.45) C29.1@220.15,450.45 220.151,450.451 DD15.14@222.65,450.451 ; v1(223.2,369.5) 223.2,370.3 223.7,370.8 R56.2@224.8,370.8 ; v1(224.25,457.55) C30.1@225.6,457.55 C30.1@225.6,457.55 DD14.14@228.1,457.551 ; v1(224.25,471.75) C35.1@225.6,471.75 225.601,471.751 DD18.14@228.1,471.751 ; v1(225.6,463.4) C34.1@225.6,464.65 C34.1@225.6,464.65 DD19.14@228.1,464.651 ; DD17.14@226.249,403.45 v1(227.4,403.45) C32.1@228.65,403.45 ; DD16.14@226.249,414.75 226.85,414.75 227.35,414.25 v1(227.35,413.7) 227.45,413.6 C31.1@228.7,413.6 C37.1@230.5,413.6 231.9,413.6 232.35,414.05 DD29.16@232.825,414.05 ; DD21.14@226.249,426.05 226.85,426.05 227.35,425.55 v1(227.35,425) 227.45,424.9 C33.1@228.7,424.9 C38.1@230.5,424.9 231.9,424.9 232.35,425.35 DD28.16@232.825,425.35 ; DD20.14@226.249,437.35 226.85,437.35 227.35,436.85 v1(227.35,436.3) 227.45,436.2 C36.1@228.7,436.2 C39.1@230.5,436.2 231.9,436.2 232.35,436.65 DD27.16@232.825,436.65 ; C40.1@230.55,447.95 v1(231.8,447.95) DD26.16@232.825,447.95 ; v1(240.6,475.4) C20.1@242,475.4 242,475.9 242.6,476.5 DD6.5@243.75,476.5 ; DD22.16@244.875,406.95 v1(245.9,406.95) C28.1@247.15,406.95 ; DD23.16@244.875,418.25 245.25,418.25 245.7,418.7 C27.1@247.2,418.7 C22.1@249,418.7 250.25,418.7 v1(250.35,418.6) 250.35,418.05 250.85,417.55 DD10.14@251.451,417.55 ; DD24.16@244.875,429.55 245.25,429.55 245.7,430 C26.1@247.2,430 C21.1@249,430 250.25,430 v1(250.35,429.9) 250.35,429.35 250.85,428.85 DD11.14@251.451,428.85 ; DD25.16@244.875,440.85 245.25,440.85 245.7,441.3 C25.1@247.2,441.3 C23.1@249,441.3 250.25,441.3 v1(250.35,441.2) 250.35,440.65 250.85,440.15 DD12.14@251.451,440.15 ; DD4.5@245.7,464.95 245.7,464.5 246.75,463.45 DD7.5@247.5,463.45 247.5,463.9 248.5,464.9 C15.1@248.5,467.1 ; v1(247.3,467.1) C15.1@248.5,467.1 ; C24.1@249.05,451.45 v1(250.3,451.45) DD13.14@251.451,451.45 ; DD8.5@250.1,471.55 249.25,471.55 248.5,470.8 248.5,468.3 ; DD5.14@254.191,468 252.8,468 252.5,468.3 248.5,468.3 ; C15.1@248.5,467.1 248.5,468.3
  Top Layer, Top w0.5: C1.3@257.4,477.7 257.4,477.3 258.2,476.5 259.4,476.5 ; 264.3,476.5 C13.1@264.3,478.9
  Top Layer, Top w0.8: v1(252.1,386) 252.088,386 VT1.3@251.077,387.011 ; VT1.3@251.077,387.011 251.089,387.011 VT1.3@251.077,387.011
  Top Layer, Top w2: 259.4,476.5 264.3,476.5 v1(269.4,476.5)
  other v1: 269.4,475 269.4,478
+3.3V_DECT: C4.1 C7.1 C52.1 DA1.25 DA1.63 DA1.64 L1.2 R16.2 R50.2 R51.2 R60.1 SA19.1 SA19.2 | length 27.4
  Top Layer, Top w0.2: R16.2@237.7,366.6 v1(237.7,368)
  Top Layer, Top w0.25: C7.1@244.434,361.966 244.434,362.023 245.005,362.595 ; DA1.63@245.568,363.157 245.005,362.595 ; DA1.64@245.922,362.804 245.518,362.4 245.2,362.4 245.005,362.595 ; DA1.25@254.761,378.714 255.247,379.2 255.6,379.2 C4.1@256.134,379.734 ; SA19.1@257.317,378.683 SA19.2@257.883,378.117 ; v1(258,379.8) 260.1,381.9 R51.2@264.5,381.9 R50.2@264.5,380.1
  Top Layer, Top w0.3: v1(258,379.8) v1@258.016,379.8
  Top Layer, Top w0.4: v1(237.7,368) R60.1@237.7,369.4 ; v1(243,362.4) 244,362.4 C7.1@244.434,361.966 ; C4.1@256.134,379.734 256.134,379.666 256.8,379 257,379 SA19.1@257.317,378.683 ; SA19.2@257.883,378.117 258.4,378.634 258.4,379.4 v1(258,379.8)
  Top Layer, Top w0.8: v1(244.5,382.2) 244.5,383.263 L1.2@245.562,384.324
  Top Layer, Top w1: C52.1@243.037,380.737 v1(244.5,382.2)
/CS: DD2.3 DD3.3 | length 18.1
  Top Layer, Top w0.25: DD2.3@261.65,392.05 263.45,392.05 263.8,391.7 v1(264.6,391.7) ; DD3.3@267.575,404.95 267.575,403.325 v1(267.9,403)
  Bottom Layer, Bottom w0.25: v1(264.6,391.7) 265,392.1 265,396.7 264.7,397 264.7,399.8 v1(267.9,403)
/CS_0: DD3.1 R25.5 R27.3 X8.10 | length 35
  Top Layer, Top w0.25: R27.3@262.65,406.7 v1(262.65,407.8) 264.35,407.8 266.275,405.875 DD3.1@266.275,404.95 266.275,402.575 266.95,401.9 R25.5@266.95,401.3
  Bottom Layer, Bottom w0.25: v1(262.65,407.8) 264,407.8 266.4,410.2 266.4,428.4 X8.10@267.56,429.56
/CS_1: DD3.5 R25.1 R27.7 X8.12 | length 44.5
  Top Layer, Top w0.25: R27.7@260.95,406.7 v1(260.95,409.4) 266.1,409.4 268.875,406.625 DD3.5@268.875,404.95 268.875,402.425 268.65,402.2 R25.1@268.65,401.3
  Bottom Layer, Bottom w0.25: v1(260.95,409.4) 264.2,409.4 265.4,410.6 265.4,429.94 X8.12@267.56,432.1
/CS_2: DD3.2 R25.3 R27.5 X8.14 | length 44.3
  Top Layer, Top w0.25: R27.5@261.85,406.7 v1(261.85,408.6) 264.4,408.6 266.925,406.075 DD3.2@266.925,404.95 266.925,402.675 267.75,401.85 R25.3@267.75,401.3
  Bottom Layer, Bottom w0.25: v1(261.85,408.6) 264.1,408.6 265.9,410.4 265.9,429.5 267.2,430.8 268.1,430.8 268.7,431.4 268.7,433.5 X8.14@267.56,434.64
/CS_DECT0: DD2.1 R25.6 | length 13.6
  Top Layer, Top w0.25: DD2.1@261.65,390.75 262.9,390.75 v1(263.25,390.4) ; v1(265.5,397.7) 266.4,397.7 266.95,398.25 R25.6@266.95,399.5
  Bottom Layer, Bottom w0.25: v1(263.25,390.4) 264.4,390.4 265.5,391.5 v1(265.5,397.7)
/CS_DECT1: DD2.27 R25.2 | length 18.1
  Top Layer, Top w0.25: DD2.27@260.1,389.85 260.1,389 260.525,388.575 263.675,388.575 263.9,388.8 v1(264.85,388.8) ; v1(267.1,396.1) 267.1,397 268.65,398.55 R25.2@268.65,399.5
  Bottom Layer, Bottom w0.25: v1(264.85,388.8) 266.5,390.45 266.5,395.5 v1(267.1,396.1)
/CS_DECT2: DD2.28 R25.4 | length 16
  Top Layer, Top w0.25: DD2.28@260.75,389.85 260.75,389.2 260.925,389.025 263.475,389.025 v1(264.05,389.6) ; v1(266.3,396.9) 267.75,398.35 R25.4@267.75,399.5
  Bottom Layer, Bottom w0.25: v1(264.05,389.6) 264.6,389.6 266,391 266,396.6 v1(266.3,396.9)
/INT_0: R24.1 R26.7 X8.9 | length 25.1
  Top Layer, Top w0.25: R24.1@262.5,430.8 268.86,430.8 X8.9@270.1,429.56 271.8,431.26 271.8,435.3 269.4,437.7 263.9,437.7 263.2,438.4 R26.7@262.5,438.4
/INT_1: R24.3 R26.5 X8.11 | length 22.1
  Top Layer, Top w0.25: R24.3@262.5,431.7 263.5,431.7 265.2,433.4 268.8,433.4 X8.11@270.1,432.1 271.3,433.3 271.3,435.1 269.2,437.2 263.7,437.2 263.4,437.5 R26.5@262.5,437.5
/INT_2: R24.5 R26.3 X8.13 | length 13.7
  Top Layer, Top w0.25: R24.5@262.5,432.5 263.4,432.5 263.8,432.9 263.8,436.7 ; R26.3@262.5,436.7 263.8,436.7 ; X8.13@270.1,434.64 268.04,436.7 263.8,436.7
/INT_DECT0: DD2.18 R24.2 | length 51
  Top Layer, Top w0.2: v1(251.6,391.7) 254.4,391.7 255.4,392.7 DD2.18@255.95,392.7
  Top Layer, Top w0.25: v1(258.1,430.8) R24.2@260.7,430.8
  Bottom Layer, Bottom w0.2: v1(251.6,391.7) 252,392.1 252,395.3 249.8,397.5 249.8,401.7 258.1,410 v1(258.1,430.8)
/INT_DECT1: DD2.19 R24.4 | length 50.7
  Top Layer, Top w0.2: v1(252.4,390.9) 254.2,390.9 255.35,392.05 DD2.19@255.95,392.05
  Top Layer, Top w0.25: v1(258.1,431.9) 259.6,431.9 259.8,431.7 R24.4@260.7,431.7
  Bottom Layer, Bottom w0.2: v1(252.4,390.9) 252.4,403.7 258.5,409.8 258.5,430.1 258.9,430.5 258.9,431.1 v1(258.1,431.9)
/INT_DECT2: DD2.20 R24.6 | length 52.4
  Top Layer, Top w0.2: v1(253.2,390.1) 254,390.1 255.3,391.4 DD2.20@255.95,391.4
  Top Layer, Top w0.25: v1(258.1,433) 259.5,433 260,432.5 R24.6@260.7,432.5
  Bottom Layer, Bottom w0.2: v1(253.2,390.1) 253.2,391.2 252.8,391.6 252.8,395.3 254.8,397.3 254.8,405.5 258.9,409.6 258.9,429.9 259.3,430.3 259.3,431.8 v1(258.1,433)
/MCLR: DD2.26 R45.1 X3.1 | length 22.4
  Top Layer, Top w0.25: X3.1@243.419,389.016 244.603,390.2 245.069,390.2 R45.1@245.634,389.634 246.069,389.2 246.4,389.2 246.6,389.4 247,389.4 247.9,388.5 248.5,388.5 248.9,388.9 250.4,388.9 252.4,386.9 253.9,386.9 254.2,386.6 v1(257.7,386.6) ; DD2.26@259.45,389.85 259.45,388.45 v1(260.3,387.6)
  Bottom Layer, Bottom w0.25: v1(257.7,386.6) 258.7,387.6 v1(260.3,387.6)
/RST_IN_APP: R59.1 VD1.K X5.6 X6.4 | length 133.3
  Top Layer, Top w0.25: X6.4@209.57,392.76 210.64,392.76 211.15,392.25 219.25,392.25 221.5,394.5 246.2,394.5 VD1.K@247.163,393.537 ; R59.1@210.9,481 210.9,476.22 212.76,474.36 X5.6@213.92,474.36
  Bottom Layer, Bottom w0.25: X6.4@209.57,392.76 212.2,395.39 212.2,406.9 210.4,408.7 210.4,472 212.76,474.36 X5.6@213.92,474.36
/RST_IN_PRG: DD2.6 X5.1 X6.5 X7.5 | length 163.9
  Top Layer, Top w0.25: v1(213.8,399.2) 217.6,399.2 220.9,395.9 254.8,395.9 v1(255.2,396.3) ; DD2.6@261.65,394 262.4,394 262.7,394.3 263.4,394.3 ; v1(263.4,395.1) 263.4,394.3 ; v1(269.5,393.2) 269,393.2 268.8,393 264.7,393 263.4,394.3
  Bottom Layer, Bottom w0.25: X6.5@209.57,390.22 212.7,393.35 212.7,399.2 ; v1(213.8,399.2) 212.7,399.2 ; X5.1@219,476.9 217.7,475.6 217.7,473.9 217,473.2 212.3,473.2 210.9,471.8 210.9,408.9 212.7,407.1 212.7,399.2 ; v1(255.2,396.3) 258.3,396.3 259,397 262.2,397 263.4,395.8 v1(263.4,395.1) ; v1(269.5,393.2) 268.7,392.4 268.7,391.7 269.3,391.1 271.349,391.1 X7.5@272.229,390.22
/RST_OUT_APP: DD2.4 X7.4 | length 11.5
  Top Layer, Top w0.25: DD2.4@261.65,392.7 262.5,392.7 262.7,392.5 269,392.5 v1(269.5,392)
  Bottom Layer, Bottom w0.25: v1(269.5,392) 269.9,391.6 271.069,391.6 X7.4@272.229,392.76
ADR0: DD1.1 DD2.22 DD3.10 X1.7 | length 130.5
  Top Layer, Top w0.25: DD1.1@252.305,479.05 252.305,481.905 X1.7@252.33,481.93 ; v1(256.3,387.6) 256.3,388.2 256.85,388.75 DD2.22@256.85,389.85 ; v1(268.7,472.2) 269.4,472.2 272.3,469.3 272.3,415.2 270.175,413.075 DD3.10@270.175,412.05 270.175,410.525 270.8,409.9 v1(270.8,408.5)
  Bottom Layer, Bottom w0.25: X1.7@252.33,481.93 252.33,474.77 254.6,472.5 267.3,472.5 267.6,472.2 v1(268.7,472.2) ; v1(256.3,387.6) 256.3,388.2 257.5,389.4 261.9,389.4 263.75,387.55 264.75,387.55 267,389.8 267,394 269.2,396.2 269.2,406.9 v1(270.8,408.5)
ADR1: DD1.2 DD2.23 DD3.9 X1.10 | length 137.7
  Top Layer, Top w0.25: X1.10@249.79,484.47 251.035,483.225 DD1.2@251.035,479.05 ; v1(257.4,388.2) 257.4,388.8 257.5,388.9 DD2.23@257.5,389.85 ; v1(267.9,473) 269.3,473 272.8,469.5 272.8,415 270.825,413.025 DD3.9@270.825,412.05 270.825,410.575 271.3,410.1 271.3,409.1 271.6,408.8 v1(271.6,407.6)
  Bottom Layer, Bottom w0.25: X1.10@249.79,484.47 251.16,483.1 252.8,483.1 253.5,482.4 253.5,481.5 252.8,480.8 252.8,475 254.8,473 v1(267.9,473) ; v1(257.4,388.2) 258.1,388.9 261.7,388.9 263.5,387.1 265,387.1 267.5,389.6 267.5,393.8 269.7,396 269.7,406.7 270.6,407.6 v1(271.6,407.6)